# Altium PCB GateDrive.PcbDoc (part 1 of 4)
Units mm, origin at the board's own origin, x right, y up, seen from the top; angles counter-clockwise.
Board outline 204.3 x 129.8 mm, 4 copper layers (Top Layer, Internal Plane 1, Internal Plane 2, Bottom Layer), stack 0.778 mm thick; 412 components, 227 nets, 1153 pads, 570 vias.
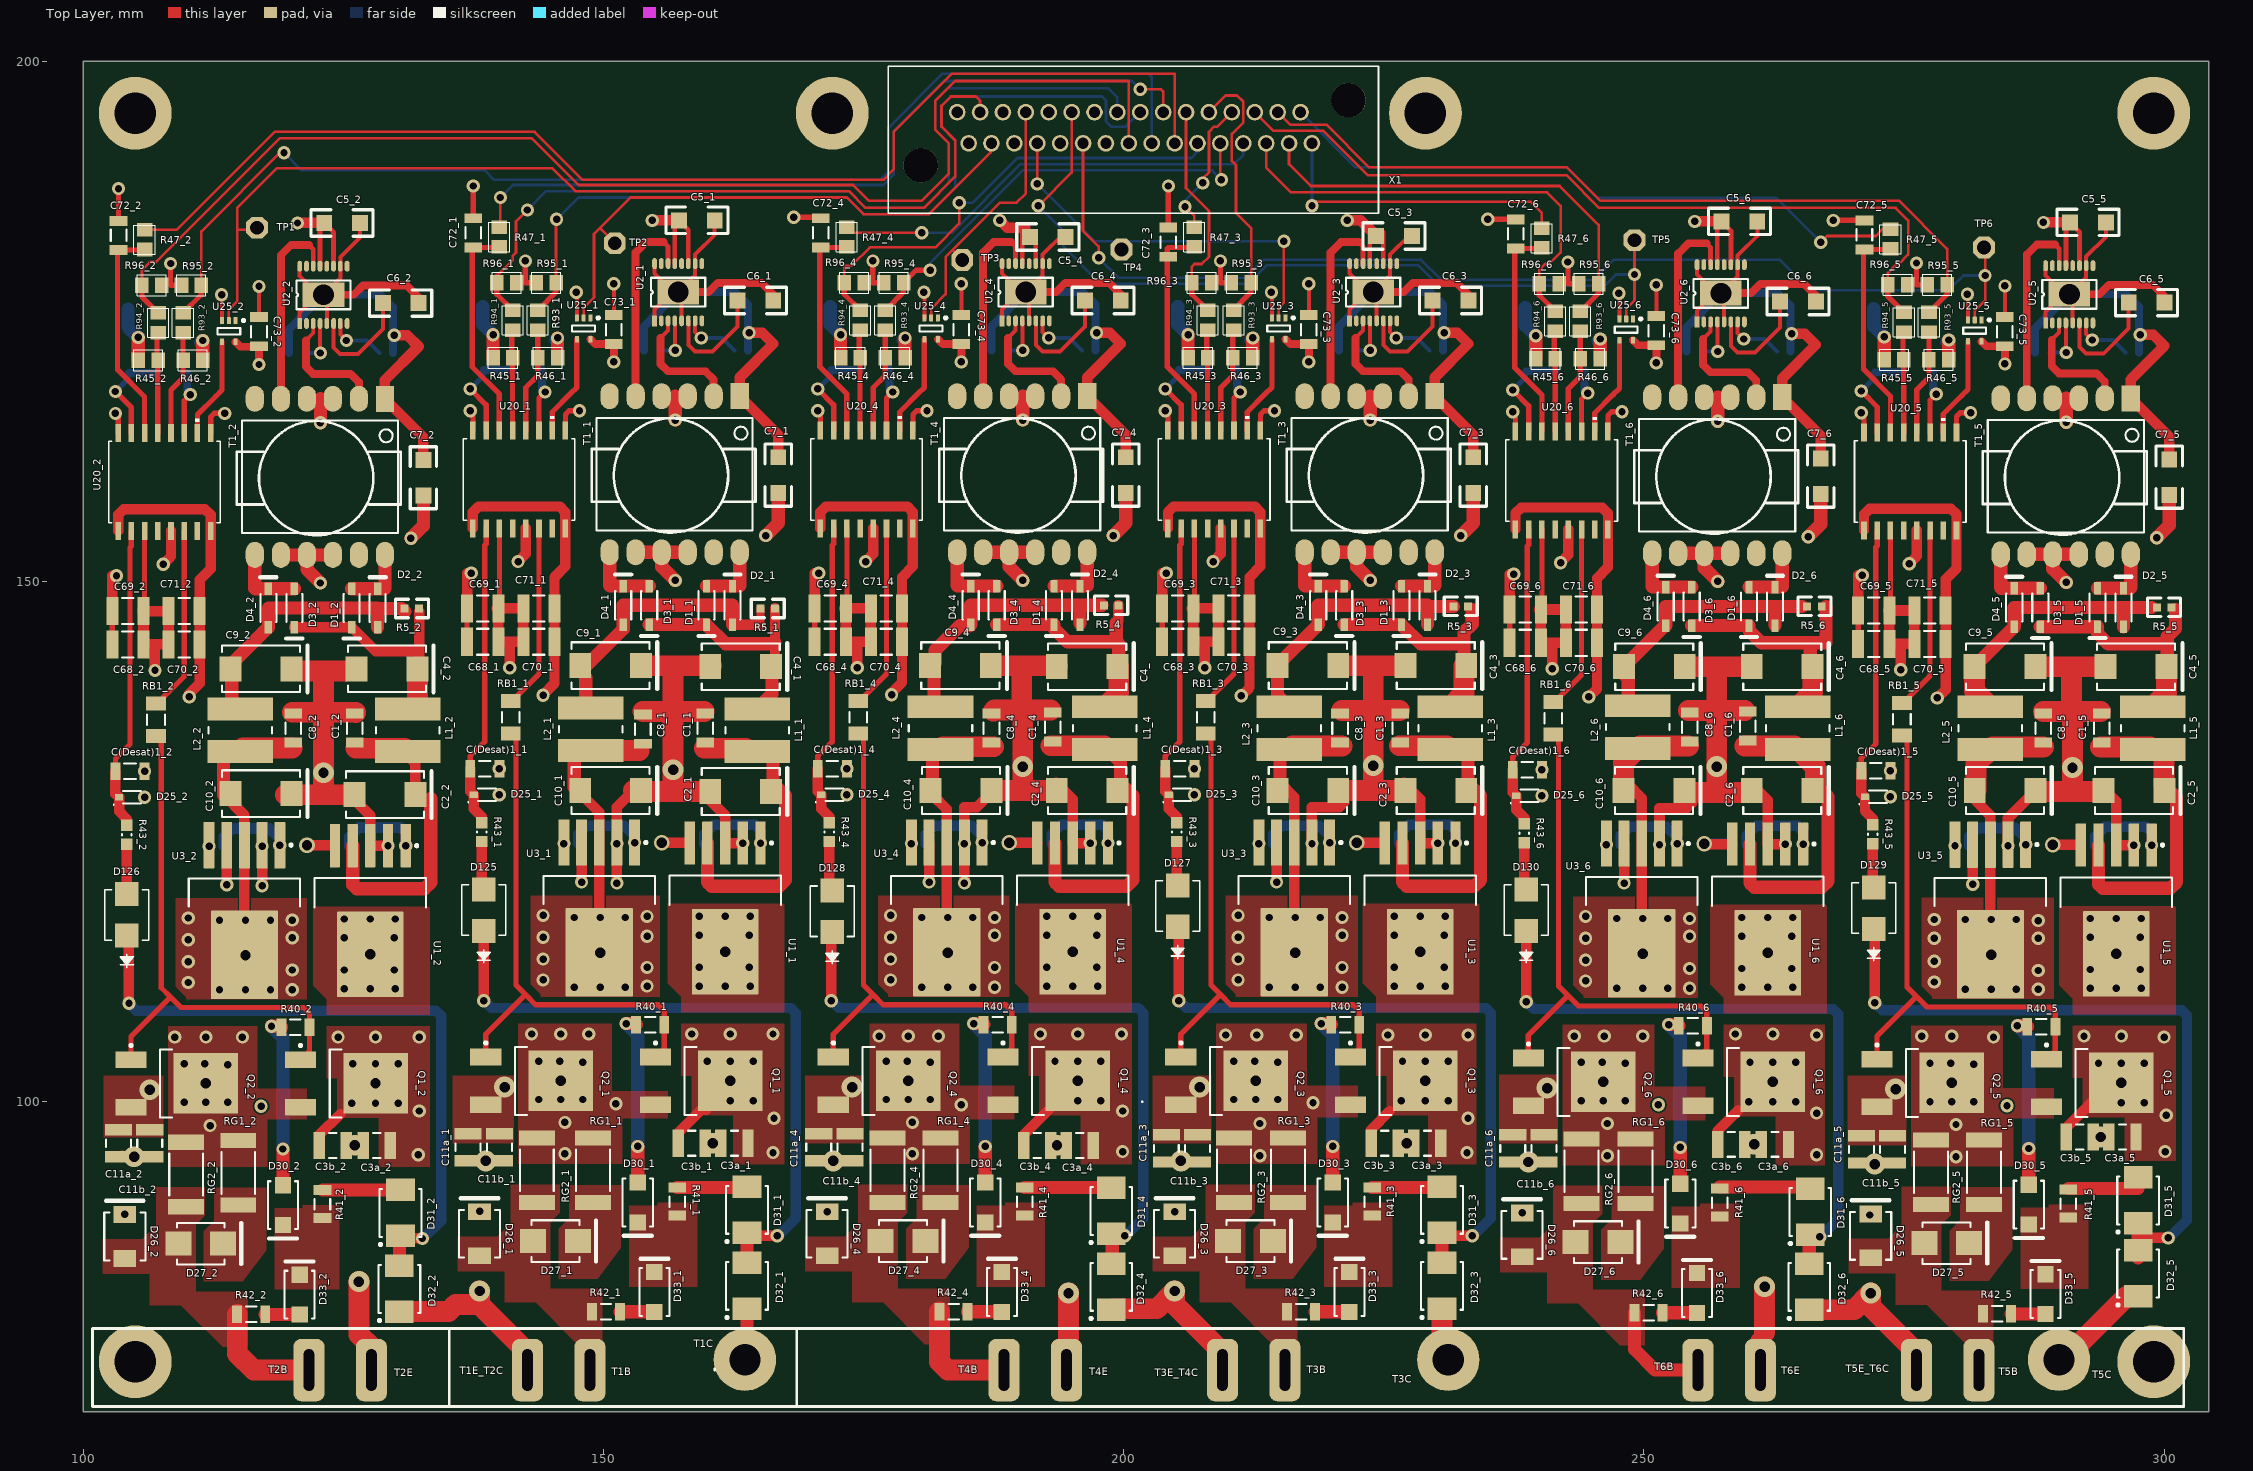
[diagram p0: Top Layer view]
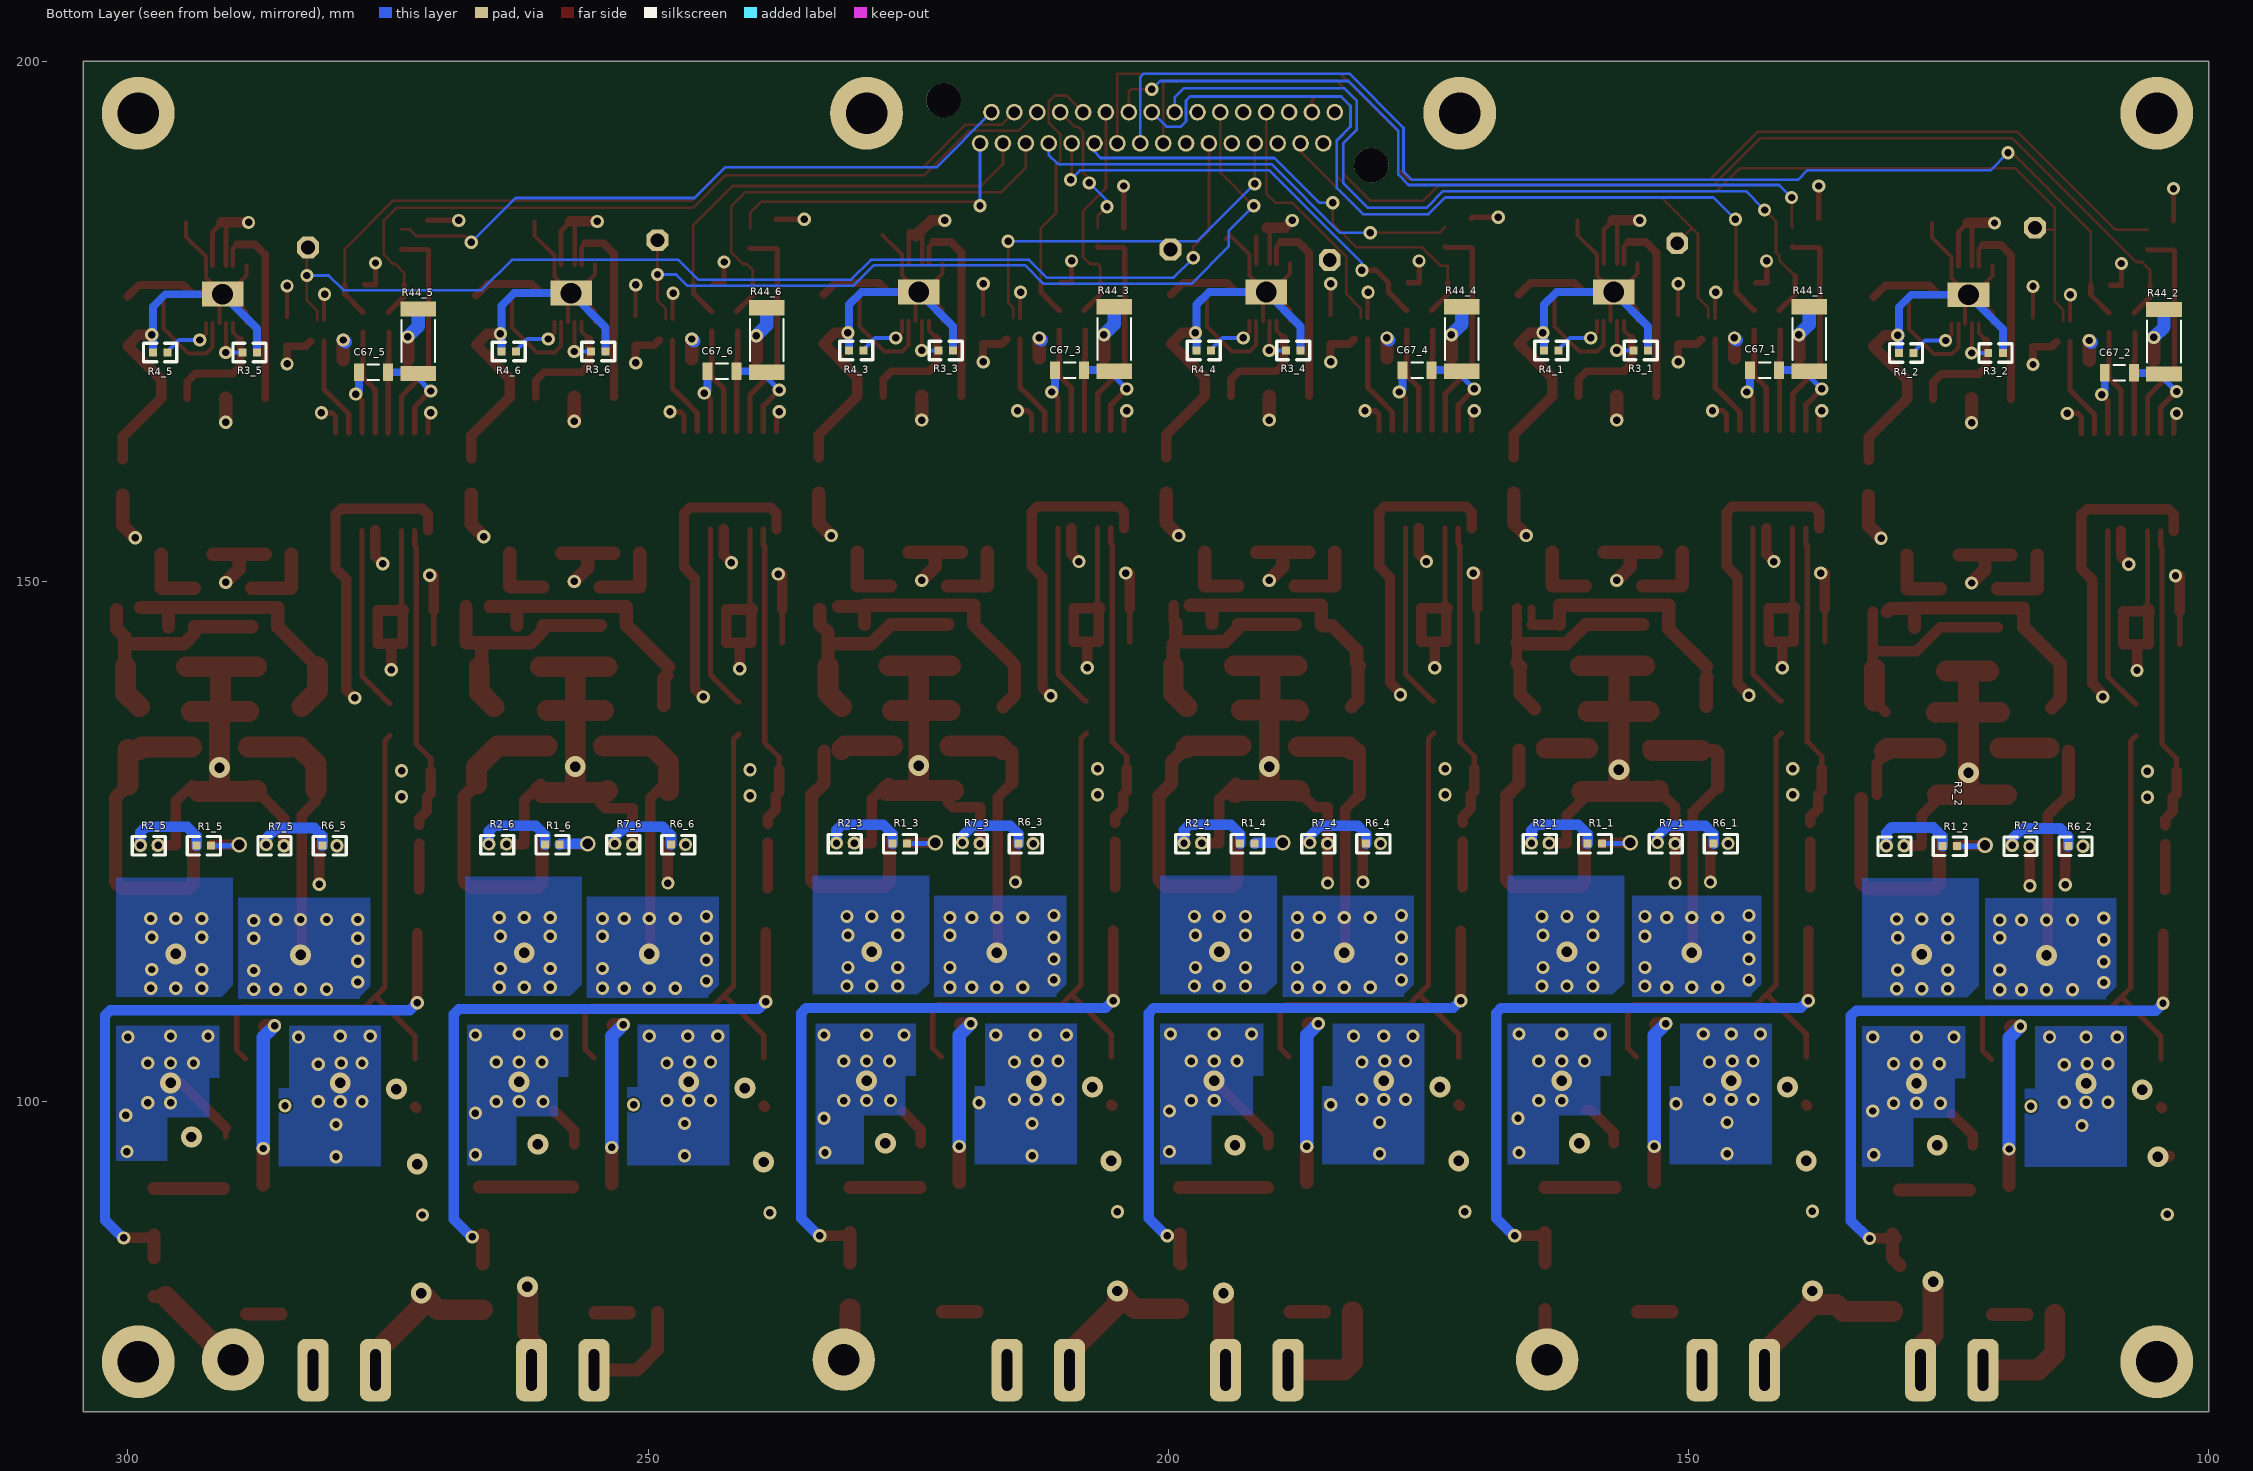
[diagram p1: Bottom Layer view, seen from below]
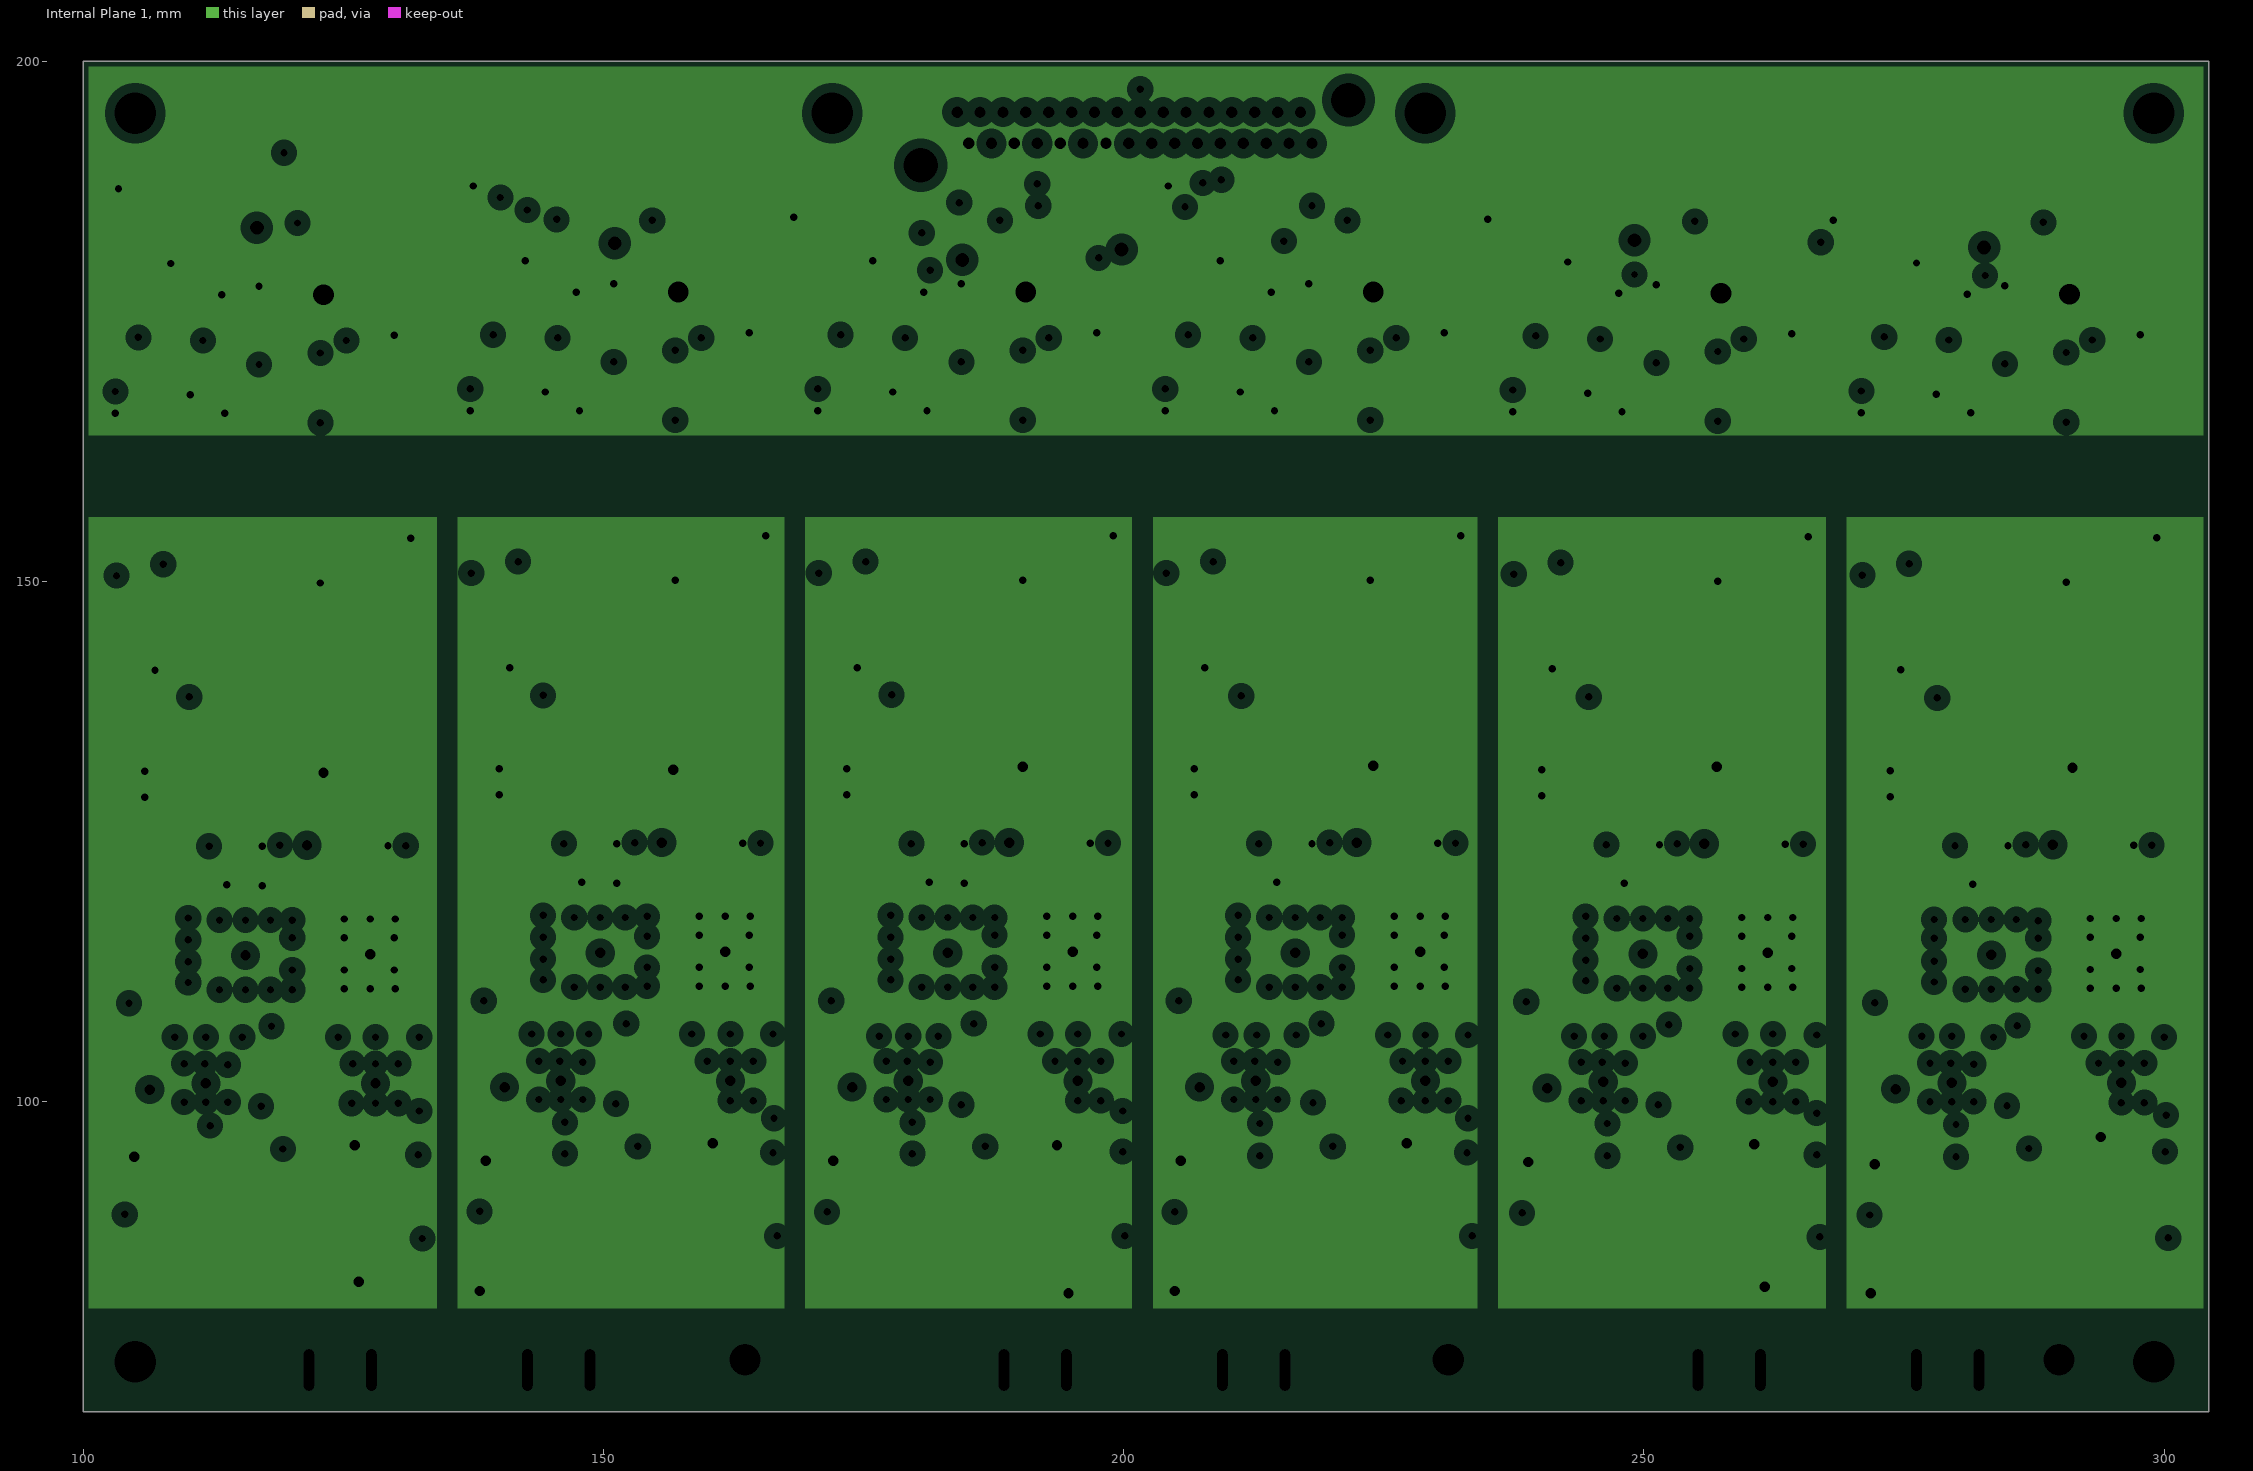
[diagram p2: Internal Plane 1, clearances drawn from the general rule]
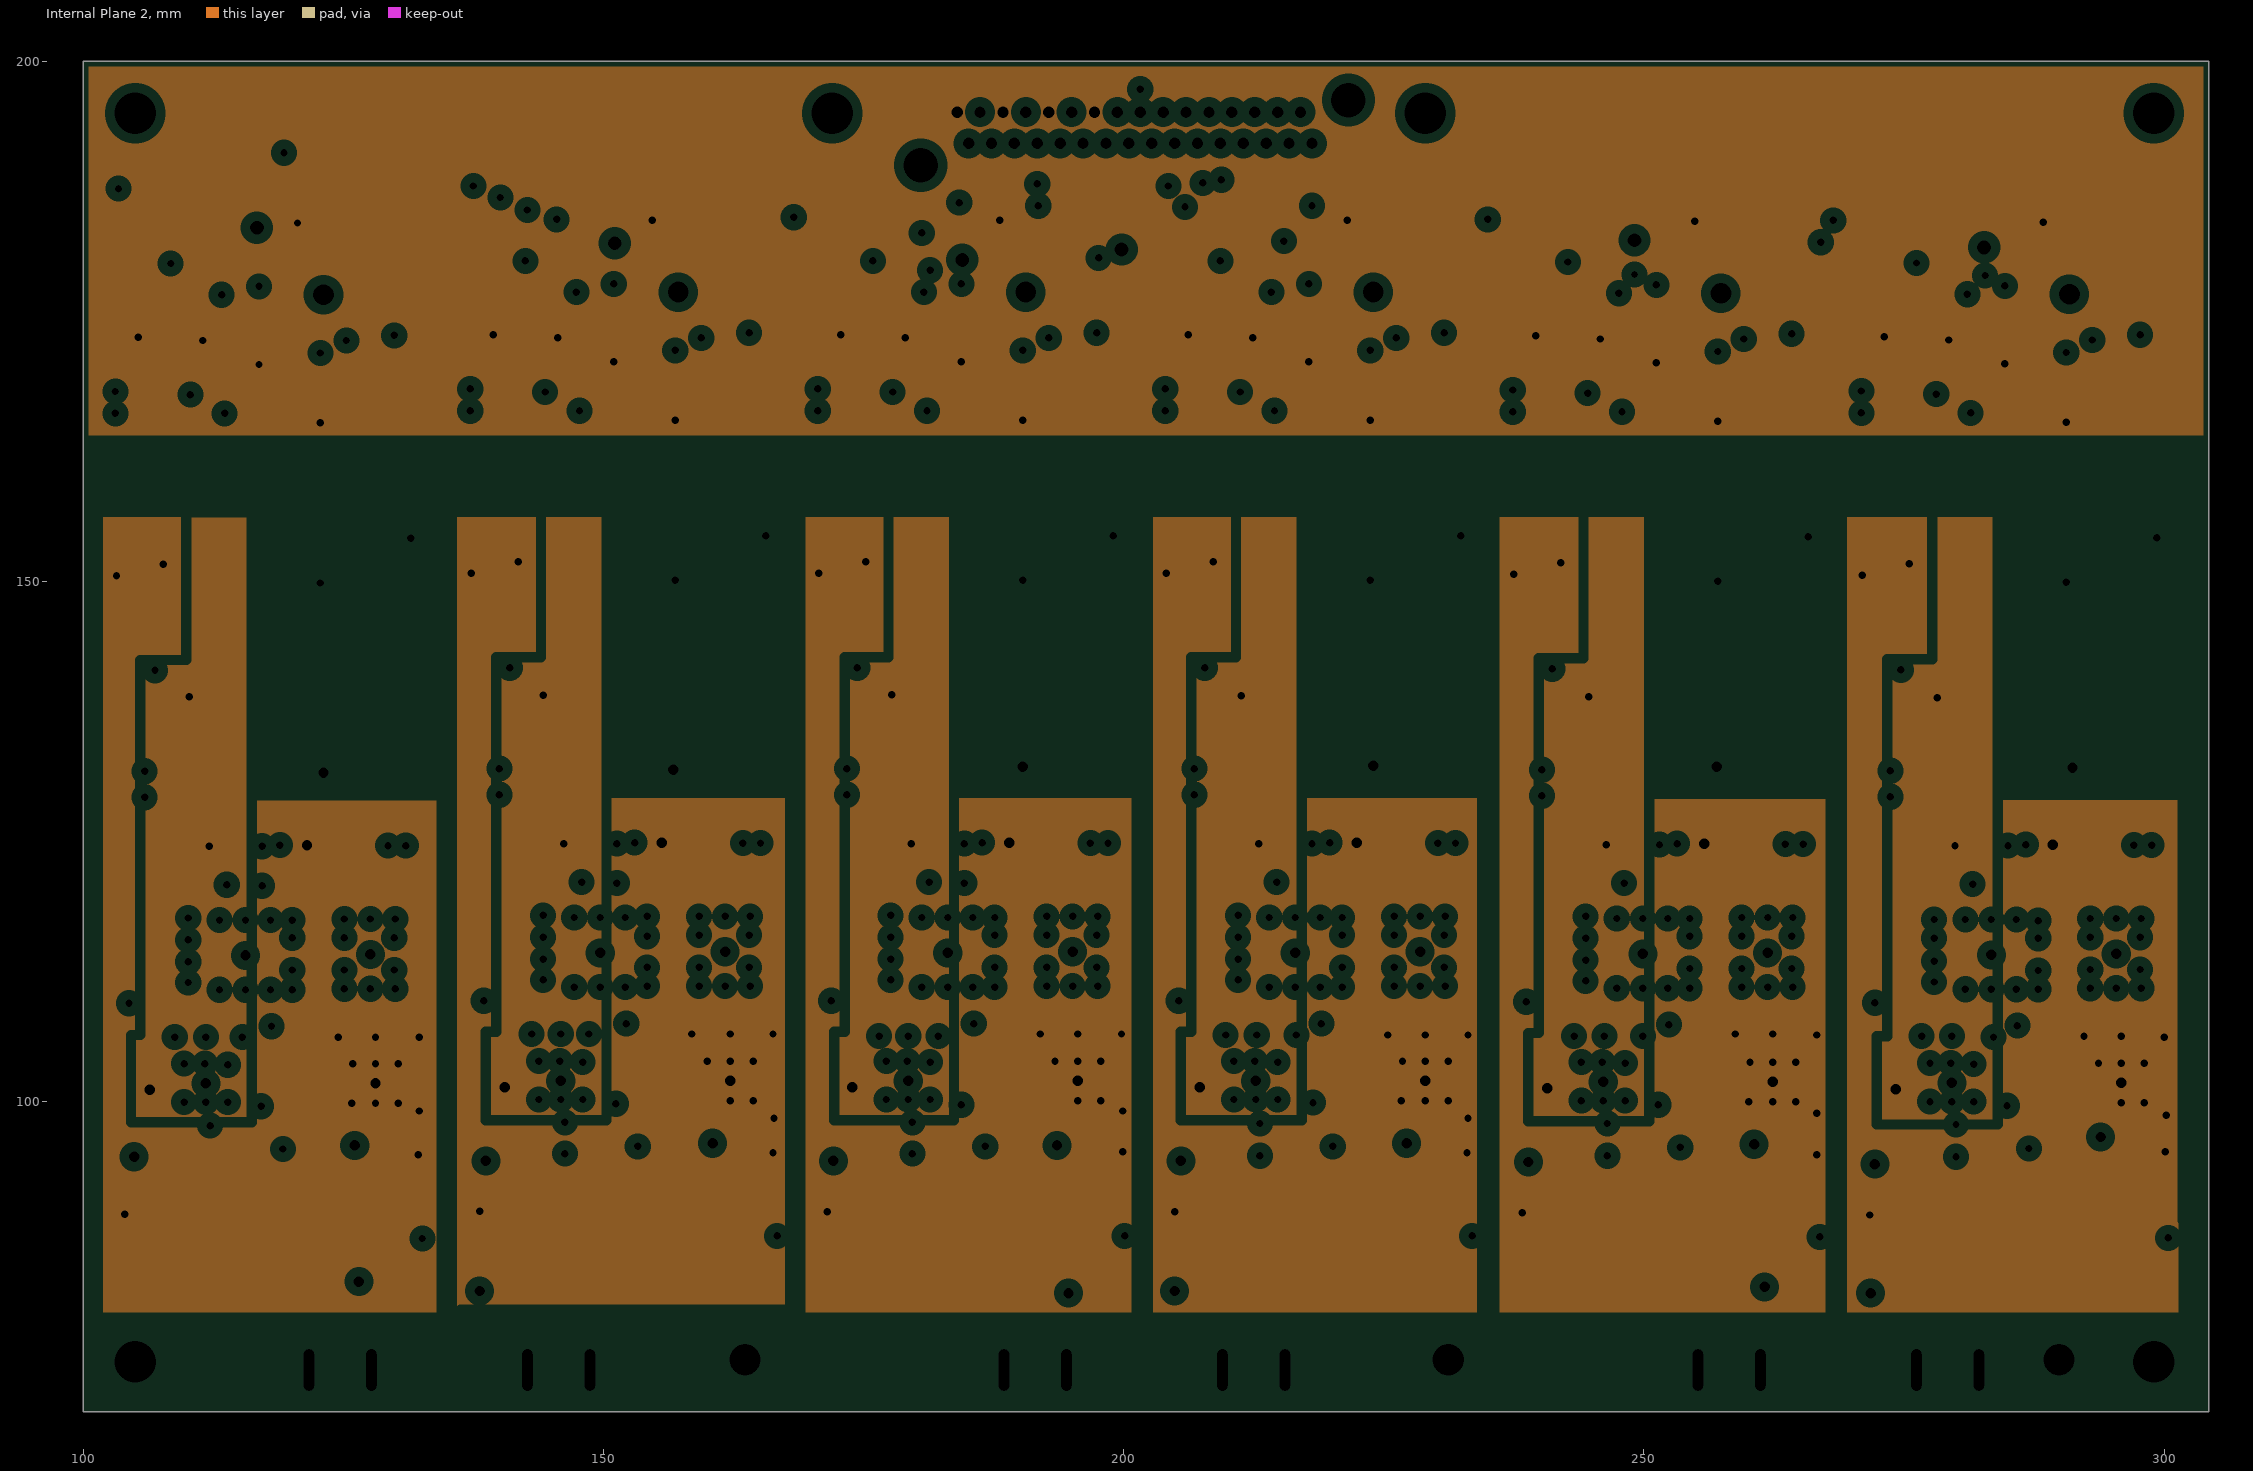
[diagram p3: Internal Plane 2, clearances drawn from the general rule]

## Layer stack, top to bottom
Top Solder: solder mask 0.0102, Solder Resist, Dk 3.5
Top Layer: signal copper 0.0356
Dielectric 1: core 0.254, FR-4, Dk 4.2
Internal Plane 1: plane copper 0.036, net (Multiple Nets)
Dielectric 3: prepreg 0.127, Dk 4.2
Internal Plane 2: plane copper 0.036, net (Multiple Nets)
Dielectric 2: core 0.254, Dk 4.2
Bottom Layer: signal copper 0.0356
Bottom Solder: solder mask 0.0102, Solder Resist, Dk 3.5

## Board outline
100,200 100,70.2 304.3,70.2 304.3,200

## Design rules (kind name [scope] priority, off if disabled: settings)
Clearance [All] p1: gap=0.152 ignorepadtopadclearanceinfootprint=FALSE
HoleSize [All] p1: absolutevalues=TRUE maxlimit=5 minlimit=0.381 maxpercent=80.000 minpercent=20.000
MinimumSolderMaskSliver [All] p1 off: minsoldermaskwidth=0.254
NetAntennae [All] p1 off: netantennaetolerance=0
PlaneClearance [All] p1: clearance=0.9
PlaneConnect [All] p1: planeconnectstyle=Relief reliefexpansion=0.508 reliefentries=4 reliefconductorwidth=0.6 reliefairgap=0.35
PolygonConnect [All] p1: connectstyle=Direct reliefconductorwidth=0.254 reliefentries=4 polygonreliefangle="90 Angle" airgapwidth=0.254
RoutingVias [All] p1: holewidth=0.711 width=1.27 viastyle="Through Hole" minholewidth=0.711 minwidth=1.27 maxholewidth=0.711 maxwidth=1.27
SilkToSolderMaskClearance [IsPad] p1 off: minsilkscreentomaskgap=0.254 clearancetoexposedcopper=TRUE
SolderMaskExpansion [All] p1: expansion=0.102
Width [All] p1: maxlimit=2.54 minlimit=0.254 preferedwidth=1.27
24 further rules are at their usual default settings.

## Classes and differential pairs
component class IO: C73_1 C73_2 C73_3 C73_4 C73_5 C73_6 TP1 TP2 TP3 TP4 TP5 TP6 U25_1 U25_2 U25_3 U25_4 U25_5 U25_6 X1 X?
component class "Gate Drivers W Phase": C67_5 C67_6 C68_5 C68_6 C69_5 C69_6 C70_5 C70_6 C71_5 C71_6 C72_5 C72_6 C(Desat)1_5 C(Desat)1_6 CR1_5 CR1_6 D25_5 D25_6 D26_5 D26_6 D27_5 D27_6 D30_5 D30_6 D31_5 D31_6 D32_5 D32_6 D33_5 D33_6 D129 D130 Q1_5 Q1_6 Q2_5 Q2_6 R40_5 R40_6 R41_5 R41_6 R42_5 R42_6 R43_5 R43_6 R44_5 R44_6 R45_5 R45_6 R46_5 R46_6 R47_5 R47_6 R93_5 R93_6 R94_5 R94_6 R95_5 R95_6 R96_5 R96_6 RB1_5 RB1_6 RG1_5 RG1_6 RG2_5 RG2_6 T5B T5C T5E_T6C T6B T6E U20_5 U20_6
component class "Gate Drivers V Phase": C67_3 C67_4 C68_3 C68_4 C69_3 C69_4 C70_3 C70_4 C71_3 C71_4 C72_3 C72_4 C(Desat)1_3 C(Desat)1_4 CR1_3 CR1_4 D25_3 D25_4 D26_3 D26_4 D27_3 D27_4 D30_3 D30_4 D31_3 D31_4 D32_3 D32_4 D33_3 D33_4 D127 D128 Q1_3 Q1_4 Q2_3 Q2_4 R40_3 R40_4 R41_3 R41_4 R42_3 R42_4 R43_3 R43_4 R44_3 R44_4 R45_3 R45_4 R46_3 R46_4 R47_3 R47_4 R93_3 R93_4 R94_3 R94_4 R95_3 R95_4 R96_3 R96_4 RB1_3 RB1_4 RG1_3 RG1_4 RG2_3 RG2_4 T3B T3C T3E_T4C T4B T4E U20_3 U20_4
component class "Gate Drivers U Phase": C67_1 C67_2 C68_1 C68_2 C69_1 C69_2 C70_1 C70_2 C71_1 C71_2 C72_1 C72_2 C(Desat)1_1 C(Desat)1_2 CR1_1 CR1_2 D25_1 D25_2 D26_1 D26_2 D27_1 D27_2 D30_1 D30_2 D31_1 D31_2 D32_1 D32_2 D33_1 D33_2 D125 D126 Q1_1 Q1_2 Q2_1 Q2_2 R40_1 R40_2 R41_1 R41_2 R42_1 R42_2 R43_1 R43_2 R44_1 R44_2 R45_1 R45_2 R46_1 R46_2 R47_1 R47_2 R93_1 R93_2 R94_1 R94_2 R95_1 R95_2 R96_1 R96_2 RB1_1 RB1_2 RG1_1 RG1_2 RG2_1 RG2_2 T1B T1C T1E_T2C T2B T2E U20_1 U20_2
component class "Gatedrive Power2": C1_4 C1_5 C1_6 C2_4 C2_5 C2_6 C3a_4 C3a_5 C3a_6 C3b_4 C3b_5 C3b_6 C4_ C4_5 C4_6 C5_4 C5_5 C5_6 C6_4 C6_5 C6_6 C7_4 C7_5 C7_6 C8_4 C8_5 C8_6 C9_4 C9_5 C9_6 C10_4 C10_5 C10_6 C11a_4 C11a_5 C11a_6 C11b_4 C11b_5 C11b_6 C34 C35 C36 C37 C38 C39 C40 C41 C42 C43 C44 C45 C46 C47 C48 C49 C50 C51 C52 C53 C54 C55 C56 C57 C58 C59 C60 C61 C62 C63 C64 C65 C66 D1_4 D1_5 D1_6 D2_4 D2_5 D2_6 D3_4 D3_5 D3_6 D4_4 D4_5 D4_6 D13 D14 D15 D16 D17 D18 D19 D20 D21 D22 D23 D24 L1_4 L1_5 L1_6 L2_4 L2_5 L2_6 L7 L8 L9 L10 L11 L12 R1_4 R1_5 R1_6 R2_4 R2_5 R2_6 R3_4 R3_5 R3_6 R4_4 R4_5 R4_6 R5_4 R5_5 R5_6 R6_4 R6_5 R6_6 R7_4 R7_5 R7_6 R22 R23 R24 R25 R26 R27 R28 R29 R30 R31 R32 R33 R34 R35 R36 R37 R38 R39 T1_4 T1_5 T1_6 T4 T5 T6 U1_4 U1_5 U1_6 U2_4 U2_5 U2_6 U3_4 U3_5 U3_6 U10 U11 U12 U13 U14 U15 U16 U17 U18
component class "Gatedrive Power1": C1_1 C1_2 C1_3 C2_1 C2_2 C2_3 C3a_1 C3a_2 C3a_3 C3b_1 C3b_2 C3b_3 C4_1 C4_2 C4_3 C5_1 C5_2 C5_3 C6_1 C6_2 C6_3 C7_1 C7_2 C7_3 C8_1 C8_2 C8_3 C9_1 C9_2 C9_3 C10_1 C10_2 C10_3 C11a_1 C11a_2 C11a_3 C11b_1 C11b_2 C11b_3 C12 C13 C14 C15 C16 C17 C18 C19 C20 C21 C22 C23 C24 C25 C26 C27 C28 C29 C30 C31 C32 C33 D1_1 D1_2 D1_3 D2_1 D2_2 D2_3 D3_1 D3_2 D3_3 D4_1 D4_2 D4_3 D5 D6 D7 D8 D9 D10 D11 D12 L1_1 L1_2 L1_3 L2_1 L2_2 L2_3 L3 L4 L5 L6 R1_1 R1_2 R1_3 R2_1 R2_2 R2_3 R3_1 R3_2 R3_3 R4_1 R4_2 R4_3 R5_1 R5_2 R5_3 R6_1 R6_2 R6_3 R7_1 R7_2 R7_3 R8 R9 R10 R11 R12 R13 R14 R15 R16 R17 R18 R19 R20 R21 T1_1 T1_2 T1_3 T2 T3 U1_1 U1_2 U1_3 U2_1 U2_2 U2_3 U3_1 U3_2 U3_3 U4 U5 U6 U7 U8 U9

## Components (designator, comment, footprint, x,y, rotation, side; value= is the part's Value field where it differs from the comment)
C1_1 "CAP 470nF 25V 1206(3216)" CAPC1206(3216)100_L 159.8,135.9 r270 top value=470nF
C1_2 "CAP 470nF 25V 1206(3216)" CAPC1206(3216)100_L 126.1,135.9 r270 top value=470nF
C1_3 "CAP 470nF 25V 1206(3216)" CAPC1206(3216)100_L 226.6,135.9 r270 top value=470nF
C1_4 "CAP 470nF 25V 1206(3216)" CAPC1206(3216)100_L 193.2,136 r270 top value=470nF
C1_5 "CAP 470nF 25V 1206(3216)" CAPC1206(3216)100_L 294,135.9 r270 top value=470nF
C1_6 "CAP 470nF 25V 1206(3216)" CAPC1206(3216)100_L 260,136.1 r270 top value=470nF
C2_1 "TPSD476K025R0150" AVX-7343-31_L 163.2,129.8 r180 top
C2_2 "TPSD476K025R0150" AVX-7343-31_L 129,129.5 r180 top
C2_3 "TPSD476K025R0150" AVX-7343-31_L 230,129.9 r180 top
C2_4 "TPSD476K025R0150" AVX-7343-31_L 196.5,129.9 r180 top
C2_5 "TPSD476K025R0150" AVX-7343-31_L 297.1,129.9 r180 top
C2_6 "TPSD476K025R0150" AVX-7343-31_L 263.3,129.9 r180 top
C3a_1 "12103D226KAT2A" CAPC3225X279X50LL20T25 162.6,96 r0 top
C3a_2 "12103D226KAT2A" CAPC3225X279X50LL20T25 128.2,95.8 r0 top
C3a_3 "12103D226KAT2A" CAPC3225X279X50LL20T25 229.2,96 r0 top
C3a_4 "12103D226KAT2A" CAPC3225X279X50LL20T25 195.8,95.8 r0 top
C3a_5 "12103D226KAT2A" CAPC3225X279X50LL20T25 296,96.6 r0 top
C3a_6 "12103D226KAT2A" CAPC3225X279X50LL20T25 262.6,95.9 r0 top
C3b_1 "12103D226KAT2A" CAPC3225X279X50LL20T25 158.5,96 r180 top
C3b_2 "12103D226KAT2A" CAPC3225X279X50LL20T25 124,95.8 r180 top
C3b_3 "12103D226KAT2A" CAPC3225X279X50LL20T25 225.1,96 r180 top
C3b_4 "12103D226KAT2A" CAPC3225X279X50LL20T25 191.7,95.8 r180 top
C3b_5 "12103D226KAT2A" CAPC3225X279X50LL20T25 291.9,96.6 r180 top
C3b_6 "12103D226KAT2A" CAPC3225X279X50LL20T25 258.4,95.9 r180 top
C4_ "TPSD476K025R0150" AVX-7343-31_L 196.5,141.8 r180 top
C4_1 "TPSD476K025R0150" AVX-7343-31_L 163.2,141.8 r180 top
C4_2 "TPSD476K025R0150" AVX-7343-31_L 129.2,141.6 r180 top
C4_3 "TPSD476K025R0150" AVX-7343-31_L 230,141.9 r180 top
C4_5 "TPSD476K025R0150" AVX-7343-31_L 297.3,141.8 r180 top
C4_6 "TPSD476K025R0150" AVX-7343-31_L 263.3,141.8 r180 top
C5_1 "22uF 15V" 1206 157.271,184.7 r0 top
C5_2 "22uF 15V" 1206 123.171,184.45 r0 top
C5_3 "22uF 15V" 1206 224.271,183.2 r0 top
C5_4 "22uF 15V" 1206 191,183.1 r0 top
C5_5 "22uF 15V" 1206 290.971,184.5 r0 top
C5_6 "22uF 15V" 1206 257.471,184.6 r0 top
C6_1 "820pF" 1206 162.9,177 r0 top
C6_2 "820pF" 1206 128.8,176.75 r0 top
C6_3 "820pF" 1206 229.7,177 r0 top
C6_4 "820pF" 1206 196.3,177 r0 top
C6_5 "820pF" 1206 296.6,176.8 r0 top
C6_6 "820pF" 1206 263.1,176.9 r0 top
C7_1 "2.2nF 1KV" 1206 166.8,161.929 r270 top
C7_2 "2.2nF 1KV" 1206 132.7,161.679 r270 top
C7_3 "2.2nF 1KV" 1206 233.6,161.929 r270 top
C7_4 "2.2nF 1KV" 1206 200.2,161.929 r270 top
C7_5 "2.2nF 1KV" 1206 300.5,161.729 r270 top
C7_6 "2.2nF 1KV" 1206 267,161.829 r270 top
C8_1 "CAP 470nF 25V 1206(3216)" CAPC1206(3216)100_L 153.8,135.8 r270 top value=470nF
C8_2 "CAP 470nF 25V 1206(3216)" CAPC1206(3216)100_L 120.2,135.9 r270 top value=470nF
C8_3 "CAP 470nF 25V 1206(3216)" CAPC1206(3216)100_L 220.8,135.9 r270 top value=470nF
C8_4 "CAP 470nF 25V 1206(3216)" CAPC1206(3216)100_L 187.3,135.9 r270 top value=470nF
C8_5 "CAP 470nF 25V 1206(3216)" CAPC1206(3216)100_L 288.4,135.9 r270 top value=470nF
C8_6 "CAP 470nF 25V 1206(3216)" CAPC1206(3216)100_L 254.4,136 r270 top value=470nF
C9_1 "TPSD476K025R0150" AVX-7343-31_L 150.7,141.9 r180 top
C9_2 "TPSD476K025R0150" AVX-7343-31_L 117.1,141.6 r180 top
C9_3 "TPSD476K025R0150" AVX-7343-31_L 217.7,141.9 r180 top
C9_4 "TPSD476K025R0150" AVX-7343-31_L 184.3,141.9 r180 top
C9_5 "TPSD476K025R0150" AVX-7343-31_L 284.7,141.8 r180 top
C9_6 "TPSD476K025R0150" AVX-7343-31_L 251,141.8 r180 top
C10_1 "TPSD476K025R0150" AVX-7343-31_L 150.7,129.9 r180 top
C10_2 "TPSD476K025R0150" AVX-7343-31_L 117.1,129.6 r180 top
C10_3 "TPSD476K025R0150" AVX-7343-31_L 217.7,129.9 r180 top
C10_4 "TPSD476K025R0150" AVX-7343-31_L 184.375,129.9 r180 top
C10_5 "TPSD476K025R0150" AVX-7343-31_L 284.725,129.9 r180 top
C10_6 "TPSD476K025R0150" AVX-7343-31_L 250.975,129.9 r180 top
C11a_1 "12103D226KAT2A" CAPC3225X279X50LL20T25 137,95.6 r270 top
C11a_2 "12103D226KAT2A" CAPC3225X279X50LL20T25 103.4,96 r270 top
C11a_3 "12103D226KAT2A" CAPC3225X279X50LL20T25 204.1,95.5 r270 top
C11a_4 "12103D226KAT2A" CAPC3225X279X50LL20T25 170.7,95.6 r270 top
C11a_5 "12103D226KAT2A" CAPC3225X279X50LL20T25 270.9,95.4 r270 top
C11a_6 "12103D226KAT2A" CAPC3225X279X50LL20T25 237.4,95.5 r270 top
C11b_1 "12103D226KAT2A" CAPC3225X279X50LL20T25 140,95.6 r270 top
C11b_2 "12103D226KAT2A" CAPC3225X279X50LL20T25 106.4,96 r270 top
C11b_3 "12103D226KAT2A" CAPC3225X279X50LL20T25 207.1,95.5 r270 top
C11b_4 "12103D226KAT2A" CAPC3225X279X50LL20T25 173.7,95.6 r270 top
C11b_5 "12103D226KAT2A" CAPC3225X279X50LL20T25 273.9,95.4 r270 top
C11b_6 "12103D226KAT2A" CAPC3225X279X50LL20T25 240.4,95.5 r270 top
C67_1 "100nF" CAPC1206(3216)75_L 142.7,170.3 r180 bottom
C67_2 "100nF" CAPC1206(3216)75_L 108.6,170.05 r180 bottom
C67_3 "100nF" CAPC1206(3216)75_L 209.5,170.3 r180 bottom
C67_4 "100nF" CAPC1206(3216)75_L 176.1,170.3 r180 bottom
C67_5 "100nF" CAPC1206(3216)75_L 276.4,170.1 r180 bottom
C67_6 "100nF" CAPC1206(3216)75_L 242.9,170.2 r180 bottom
C68_1 "1uF" CAPC1210(3225)170_N 138.4,144.2 r180 top
C68_2 "1uF" CAPC1210(3225)170_N 104.3,143.95 r180 top
C68_3 "1uF" CAPC1210(3225)170_N 205.2,144.2 r180 top
C68_4 "1uF" CAPC1210(3225)170_N 171.8,144.2 r180 top
C68_5 "1uF" CAPC1210(3225)170_N 272.1,144 r180 top
C68_6 "1uF" CAPC1210(3225)170_N 238.6,144.1 r180 top
C69_1 "1uF" CAPC1210(3225)170_N 138.4,147.4 r180 top
C69_2 "1uF" CAPC1210(3225)170_N 104.3,147.15 r180 top
C69_3 "1uF" CAPC1210(3225)170_N 205.2,147.4 r180 top
C69_4 "1uF" CAPC1210(3225)170_N 171.8,147.4 r180 top
C69_5 "1uF" CAPC1210(3225)170_N 272.1,147.2 r180 top
C69_6 "1uF" CAPC1210(3225)170_N 238.6,147.3 r180 top
C70_1 "1uF" CAPC1210(3225)170_N 143.8,144.2 r180 top
C70_2 "1uF" CAPC1210(3225)170_N 109.7,143.95 r180 top
C70_3 "1uF" CAPC1210(3225)170_N 210.6,144.2 r180 top
C70_4 "1uF" CAPC1210(3225)170_N 177.2,144.2 r180 top
C70_5 "1uF" CAPC1210(3225)170_N 277.5,144 r180 top
C70_6 "1uF" CAPC1210(3225)170_N 244,144.1 r180 top
C71_1 "1uF" CAPC1210(3225)170_N 143.8,147.4 r180 top
C71_2 "1uF" CAPC1210(3225)170_N 109.7,147.15 r180 top
C71_3 "1uF" CAPC1210(3225)170_N 210.6,147.4 r180 top
C71_4 "1uF" CAPC1210(3225)170_N 177.2,147.4 r180 top
C71_5 "1uF" CAPC1210(3225)170_N 277.5,147.2 r180 top
C71_6 "1uF" CAPC1210(3225)170_N 244,147.3 r180 top
C72_1 "100pF" CAPC1206(3216)75_L 137.5,183.5 r270 top
C72_2 "100pF" CAPC1206(3216)75_L 103.4,183.25 r270 top
C72_3 "100pF" CAPC1206(3216)75_L 204.3,182.6 r270 top
C72_4 "100pF" CAPC1206(3216)75_L 170.9,183.5 r270 top
C72_5 "100pF" CAPC1206(3216)75_L 271.2,183.3 r270 top
C72_6 "100pF" CAPC1206(3216)75_L 237.7,183.4 r270 top
C73_1 "100nF" CAPC1206(3216)75_L 151,174.2 r90 top
C73_2 "100nF" CAPC1206(3216)75_L 116.9,174 r90 top
C73_3 "100nF" CAPC1206(3216)75_L 217.8,174.2 r90 top
C73_4 "100nF" CAPC1206(3216)75_L 184.4,174.2 r90 top
C73_5 "100nF" CAPC1206(3216)75_L 284.7,174 r90 top
C73_6 "100nF" CAPC1206(3216)75_L 251.2,174.1 r90 top
C(Desat)1_1 "100pF" CAPC1206(3216)75_L 138.6,132 r180 top
C(Desat)1_2 "100pF" CAPC1206(3216)75_L 104.5,131.75 r180 top
C(Desat)1_3 "100pF" CAPC1206(3216)75_L 205.4,132 r180 top
C(Desat)1_4 "100pF" CAPC1206(3216)75_L 172,132 r180 top
C(Desat)1_5 "100pF" CAPC1206(3216)75_L 272.3,131.8 r180 top
C(Desat)1_6 "100pF" CAPC1206(3216)75_L 238.8,131.9 r180 top
D1_1 "B0540W-7-F" DIOD-SOD-123-2-A_V 159.9,147.7 r270 top
D1_2 "B0540W-7-F" DIOD-SOD-123-2-A_V 125.8,147.45 r270 top
D1_3 "B0540W-7-F" DIOD-SOD-123-2-A_V 226.7,147.7 r270 top
D1_4 "B0540W-7-F" DIOD-SOD-123-2-A_V 193.3,147.7 r270 top
D1_5 "B0540W-7-F" DIOD-SOD-123-2-A_V 293.6,147.5 r270 top
D1_6 "B0540W-7-F" DIOD-SOD-123-2-A_V 260.1,147.6 r270 top
D2_1 "B0540W-7-F" DIOD-SOD-123-2-A_V 162.4,147.7 r90 top
D2_2 "B0540W-7-F" DIOD-SOD-123-2-A_V 128.3,147.45 r90 top
D2_3 "B0540W-7-F" DIOD-SOD-123-2-A_V 229.2,147.7 r90 top
D2_4 "B0540W-7-F" DIOD-SOD-123-2-A_V 195.8,147.7 r90 top
D2_5 "B0540W-7-F" DIOD-SOD-123-2-A_V 296.1,147.5 r90 top
D2_6 "B0540W-7-F" DIOD-SOD-123-2-A_V 262.6,147.6 r90 top
D3_1 "B0540W-7-F" DIOD-SOD-123-2-A_V 154.4,147.7 r270 top
D3_2 "B0540W-7-F" DIOD-SOD-123-2-A_V 120.3,147.45 r270 top
D3_3 "B0540W-7-F" DIOD-SOD-123-2-A_V 221.2,147.7 r270 top
D3_4 "B0540W-7-F" DIOD-SOD-123-2-A_V 187.8,147.7 r270 top
D3_5 "B0540W-7-F" DIOD-SOD-123-2-A_V 288.1,147.5 r270 top
D3_6 "B0540W-7-F" DIOD-SOD-123-2-A_V 254.6,147.6 r270 top
D4_1 "B0540W-7-F" DIOD-SOD-123-2-A_V 151.9,147.7 r90 top
D4_2 "B0540W-7-F" DIOD-SOD-123-2-A_V 117.8,147.45 r90 top
D4_3 "B0540W-7-F" DIOD-SOD-123-2-A_V 218.7,147.7 r90 top
D4_4 "B0540W-7-F" DIOD-SOD-123-2-A_V 185.3,147.7 r90 top
D4_5 "B0540W-7-F" DIOD-SOD-123-2-A_V 285.6,147.5 r90 top
D4_6 "B0540W-7-F" DIOD-SOD-123-2-A_V 252.1,147.6 r90 top
D25_1 "BAT165" INF-SOD323_V 138.8,129.5 r90 top
D25_2 "BAT165" INF-SOD323_V 104.7,129.25 r90 top
D25_3 "BAT165" INF-SOD323_V 205.6,129.5 r90 top
D25_4 "BAT165" INF-SOD323_V 172.2,129.5 r90 top
D25_5 "BAT165" INF-SOD323_V 272.5,129.3 r90 top
D25_6 "BAT165" INF-SOD323_V 239,129.4 r90 top
D26_1 "STPS160U" STM-SMB_P_V 138.1,87.3 r90 top
D26_2 "STPS160U" STM-SMB_P_V 104,87.05 r90 top
D26_3 "STPS160U" STM-SMB_P_V 204.9,87.3 r90 top
D26_4 "STPS160U" STM-SMB_P_V 171.5,87.3 r90 top
D26_5 "STPS160U" STM-SMB_P_V 271.8,87.1 r90 top
D26_6 "STPS160U" STM-SMB_P_V 238.3,87.2 r90 top
D27_1 "RS1MB-13-F" DIOD-SMB-2_V 145.4,86.6 r0 top
D27_2 "RS1MB-13-F" DIOD-SMB-2_V 111.3,86.35 r0 top
D27_3 "RS1MB-13-F" DIOD-SMB-2_V 212.2,86.6 r0 top
D27_4 "RS1MB-13-F" DIOD-SMB-2_V 178.8,86.6 r0 top
D27_5 "RS1MB-13-F" DIOD-SMB-2_V 279.1,86.4 r0 top
D27_6 "RS1MB-13-F" DIOD-SMB-2_V 245.6,86.5 r0 top
D30_1 "ES1D" FAIR-SMA-2_V 153.3,90.3 r270 top
D30_2 "ES1D" FAIR-SMA-2_V 119.2,90.05 r270 top
D30_3 "ES1D" FAIR-SMA-2_V 220.1,90.3 r270 top
D30_4 "ES1D" FAIR-SMA-2_V 186.7,90.3 r270 top
D30_5 "ES1D" FAIR-SMA-2_V 287,90.1 r270 top
D30_6 "ES1D" FAIR-SMA-2_V 253.5,90.2 r270 top
D31_1 "P6SMB36AT3G" ONSC-SMB-2-403A-03_J_V 163.8,89.6 r90 top
D31_2 "P6SMB36AT3G" ONSC-SMB-2-403A-03_J_V 130.5,89.3 r90 top
D31_3 "P6SMB36AT3G" ONSC-SMB-2-403A-03_J_V 230.6,89.6 r90 top
D31_4 "P6SMB36AT3G" ONSC-SMB-2-403A-03_J_V 198.8,89.5 r90 top
D31_5 "P6SMB36AT3G" ONSC-SMB-2-403A-03_J_V 297.5,90.5 r90 top
D31_6 "P6SMB36AT3G" ONSC-SMB-2-403A-03_J_V 266,89.4 r90 top
D32_1 "P6SMB36AT3G" ONSC-SMB-2-403A-03_J_V 163.8,82.3 r90 top
D32_2 "P6SMB36AT3G" ONSC-SMB-2-403A-03_J_V 130.4,82 r90 top
D32_3 "P6SMB36AT3G" ONSC-SMB-2-403A-03_J_V 230.6,82.3 r90 top
D32_4 "P6SMB36AT3G" ONSC-SMB-2-403A-03_J_V 198.8,82.2 r90 top
D32_5 "P6SMB36AT3G" ONSC-SMB-2-403A-03_J_V 297.5,83.49 r90 top
D32_6 "P6SMB36AT3G" ONSC-SMB-2-403A-03_J_V 265.9,82.2 r90 top
D33_1 "ES1D" FAIR-SMA-2_V 154.9,81.7 r90 top
D33_2 "ES1D" FAIR-SMA-2_V 120.8,81.45 r90 top
D33_3 "ES1D" FAIR-SMA-2_V 221.7,81.7 r90 top
D33_4 "ES1D" FAIR-SMA-2_V 188.3,81.7 r90 top
D33_5 "ES1D" FAIR-SMA-2_V 288.6,81.5 r90 top
D33_6 "ES1D" FAIR-SMA-2_V 255.1,81.6 r90 top
D125 "Part Number: STTH112U" SMB 138.5,118.4 r90 top value=Value
D126 "Part Number: STTH112U" SMB 104.2,117.95 r90 top value=Value
D127 "Part Number: STTH112U" SMB 205.2,118.8 r90 top value=Value
D128 "Part Number: STTH112U" SMB 172,118.3 r90 top value=Value
D129 "Part Number: STTH112U" SMB 272.1,118.6 r90 top value=Value
D130 "Part Number: STTH112U" SMB 238.7,118.4 r90 top value=Value
L1_1 "744053100" WE-TPC-5828-LH 164.8,135.7 r270 top
L1_2 "744053100" WE-TPC-5828-LH 131.2,135.7 r270 top
L1_3 "744053100" WE-TPC-5828-LH 231.4,135.9 r270 top
L1_4 "744053100" WE-TPC-5828-LH 198.2,135.9 r270 top
L1_5 "744053100" WE-TPC-5828-LH 298.9,135.9 r270 top
L1_6 "744053100" WE-TPC-5828-LH 264.8,135.9 r270 top
L2_1 "744053100" WE-TPC-5828-LH 148.8,135.8 r270 top
L2_2 "744053100" WE-TPC-5828-LH 115.1,135.7 r270 top
L2_3 "744053100" WE-TPC-5828-LH 215.9,135.9 r270 top
L2_4 "744053100" WE-TPC-5828-LH 182.4,135.9 r270 top
L2_5 "744053100" WE-TPC-5828-LH 283.3,135.9 r270 top
L2_6 "744053100" WE-TPC-5828-LH 249.4,136 r270 top
Q1_1 "MJD44H11T4" ONSC-DPAK-3-369C-01_V 159.4,102 r0 top
Q1_2 "MJD44H11T4" ONSC-DPAK-3-369C-01_V 125.3,101.75 r0 top
Q1_3 "MJD44H11T4" ONSC-DPAK-3-369C-01_V 226.2,102 r0 top
Q1_4 "MJD44H11T4" ONSC-DPAK-3-369C-01_V 192.8,102 r0 top
Q1_5 "MJD44H11T4" ONSC-DPAK-3-369C-01_V 293.1,101.8 r0 top
Q1_6 "MJD44H11T4" ONSC-DPAK-3-369C-01_V 259.6,101.9 r0 top
Q2_1 "MJD45H11T4" ONSC-DPAK-3-369C-01_V 143.1,102 r0 top
Q2_2 "MJD45H11T4" ONSC-DPAK-3-369C-01_V 109,101.75 r0 top
Q2_3 "MJD45H11T4" ONSC-DPAK-3-369C-01_V 209.9,102 r0 top
Q2_4 "MJD45H11T4" ONSC-DPAK-3-369C-01_V 176.5,102 r0 top
Q2_5 "MJD45H11T4" ONSC-DPAK-3-369C-01_V 276.8,101.8 r0 top
Q2_6 "MJD45H11T4" ONSC-DPAK-3-369C-01_V 243.3,101.9 r0 top
R1_1 "11K" 0603 159.7,124.8 r180 bottom
R1_2 "11K" 0603 125.6,124.55 r180 bottom
R1_3 "11K" 0603 226.5,124.8 r180 bottom
R1_4 "11K" 0603 193.1,124.8 r180 bottom
R1_5 "11K" 0603 293.4,124.6 r180 bottom
R1_6 "11K" 0603 259.9,124.7 r180 bottom
R2_1 "1K" 0603 163.6,124.8 r0 bottom
R2_2 "1K" 0603 129.5,124.55 r0 bottom
R2_3 "1K" 0603 230.4,124.8 r0 bottom
R2_4 "1K" 0603 197,124.8 r0 bottom
R2_5 "1K" 0603 297.3,124.6 r0 bottom
R2_6 "1K" 0603 263.8,124.7 r0 bottom
R3_1 "16K9" 0603 155.3,172.2 r180 bottom
R3_2 "16K9" 0603 121.2,171.95 r180 bottom
R3_3 "16K9" 0603 222.1,172.2 r180 bottom
R3_4 "16K9" 0603 188.7,172.2 r180 bottom
R3_5 "16K9" 0603 289,172 r180 bottom
R3_6 "16K9" 0603 255.5,172.1 r180 bottom
R4_1 "16K9" 0603 162.5,172.2 r0 bottom
R4_2 "16K9" 0603 128.4,171.95 r0 bottom
R4_3 "16K9" 0603 229.3,172.2 r0 bottom
R4_4 "16K9" 0603 195.9,172.2 r0 bottom
R4_5 "16K9" 0603 296.2,172 r0 bottom
R4_6 "16K9" 0603 262.7,172.1 r0 bottom
R5_1 "10K" 0603 166.497,147.4 r180 top
R5_2 "10K" 0603 132.297,147.4 r180 top
R5_3 "10K" 0603 233.1,147.6 r180 top
R5_4 "10K" 0603 199.5,147.7 r180 top
R5_5 "10K" 0603 300.7,147.5 r180 top
R5_6 "10K" 0603 267.097,147.6 r180 top
R6_1 "6K04" 0603 147.6,124.8 r180 bottom
R6_2 "6K04" 0603 113.5,124.55 r180 bottom
R6_3 "6K04" 0603 214.4,124.8 r180 bottom
R6_4 "6K04" 0603 181,124.8 r180 bottom
R6_5 "6K04" 0603 281.3,124.6 r180 bottom
R6_6 "6K04" 0603 247.8,124.7 r180 bottom
R7_1 "1000" 0603 151.5,124.8 r0 bottom
R7_2 "1000" 0603 117.4,124.55 r0 bottom
R7_3 "1000" 0603 218.3,124.8 r0 bottom
R7_4 "1000" 0603 184.9,124.8 r0 bottom
R7_5 "1000" 0603 285.2,124.6 r0 bottom
R7_6 "1000" 0603 251.7,124.7 r0 bottom
R40_1 "27R 1% 1206(3216)" RESC1206(3216)_L 154.5,107.4 r0 top value="27.00 Ohm"
R40_2 "27R 1% 1206(3216)" RESC1206(3216)_L 120.4,107.15 r0 top value="27.00 Ohm"
R40_3 "27R 1% 1206(3216)" RESC1206(3216)_L 221.3,107.4 r0 top value="27.00 Ohm"
R40_4 "27R 1% 1206(3216)" RESC1206(3216)_L 187.9,107.4 r0 top value="27.00 Ohm"
R40_5 "27R 1% 1206(3216)" RESC1206(3216)_L 288.2,107.2 r0 top value="27.00 Ohm"
R40_6 "27R 1% 1206(3216)" RESC1206(3216)_L 254.7,107.3 r0 top value="27.00 Ohm"
R41_1 "10R 1% 1206(3216)" RESC1206(3216)_L 157.1,90.4 r90 top value="10.00 Ohm"
R41_2 "10R 1% 1206(3216)" RESC1206(3216)_L 123,90.15 r90 top value="10.00 Ohm"
R41_3 "10R 1% 1206(3216)" RESC1206(3216)_L 223.9,90.4 r90 top value="10.00 Ohm"
R41_4 "10R 1% 1206(3216)" RESC1206(3216)_L 190.5,90.4 r90 top value="10.00 Ohm"
R41_5 "10R 1% 1206(3216)" RESC1206(3216)_L 290.8,90.2 r90 top value="10.00 Ohm"
R41_6 "10R 1% 1206(3216)" RESC1206(3216)_L 257.3,90.3 r90 top value="10.00 Ohm"
R42_1 "4R7 1% 1206(3216)" RESC1206(3216)_L 150.25,79.8 r0 top value="4.70 Ohm"
R42_2 "4R7 1% 1206(3216)" RESC1206(3216)_L 116.15,79.55 r0 top value="4.70 Ohm"
R42_3 "4R7 1% 1206(3216)" RESC1206(3216)_L 217.05,79.8 r0 top value="4.70 Ohm"
R42_4 "4R7 1% 1206(3216)" RESC1206(3216)_L 183.65,79.8 r0 top value="4.70 Ohm"
R42_5 "4R7 1% 1206(3216)" RESC1206(3216)_L 283.95,79.6 r0 top value="4.70 Ohm"
R42_6 "4R7 1% 1206(3216)" RESC1206(3216)_L 250.45,79.7 r0 top value="4.70 Ohm"
R43_1 "1K 1% 0603(1608)" RESC0603(1608)_M 138.3,125.9 r270 top value="1000.00 Ohm"
R43_2 "1K 1% 0603(1608)" RESC0603(1608)_M 104.2,125.65 r270 top value="1000.00 Ohm"
R43_3 "1K 1% 0603(1608)" RESC0603(1608)_M 205.1,125.9 r270 top value="1000.00 Ohm"
R43_4 "1K 1% 0603(1608)" RESC0603(1608)_M 171.7,125.9 r270 top value="1000.00 Ohm"
R43_5 "1K 1% 0603(1608)" RESC0603(1608)_M 272,125.7 r270 top value="1000.00 Ohm"
R43_6 "1K 1% 0603(1608)" RESC0603(1608)_M 238.5,125.8 r270 top value="1000.00 Ohm"
R44_1 "10R 5% 2512(6432)" RESC2512(6432)_M 138.4,173.3 r270 bottom value="2.20 Ohm"
R44_2 "10R 5% 2512(6432)" RESC2512(6432)_M 104.3,173.05 r270 bottom value="2.20 Ohm"
R44_3 "10R 5% 2512(6432)" RESC2512(6432)_M 205.2,173.3 r270 bottom value="2.20 Ohm"
R44_4 "10R 5% 2512(6432)" RESC2512(6432)_M 171.8,173.3 r270 bottom value="2.20 Ohm"
R44_5 "10R 5% 2512(6432)" RESC2512(6432)_M 272.1,173.1 r270 bottom value="2.20 Ohm"
R44_6 "10R 5% 2512(6432)" RESC2512(6432)_M 238.6,173.2 r270 bottom value="2.20 Ohm"
R45_1 "4k7" R0805 140.35,171.5 r180 top
R45_2 "4k7" R0805 106.25,171.25 r180 top
R45_3 "4k7" R0805 207.15,171.5 r180 top
R45_4 "4k7" R0805 173.75,171.5 r180 top
R45_5 "4k7" R0805 274.05,171.3 r180 top
R45_6 "4k7" R0805 240.55,171.4 r180 top
R46_1 "4k7" R0805 144.65,171.5 r0 top
R46_2 "4k7" R0805 110.55,171.25 r0 top
R46_3 "4k7" R0805 211.45,171.5 r0 top
R46_4 "4k7" R0805 178.05,171.5 r0 top
R46_5 "4k7" R0805 278.35,171.3 r0 top
R46_6 "4k7" R0805 244.85,171.4 r0 top
R47_1 "100R" R0805 140,183.1 r90 top
R47_2 "100R" R0805 105.9,182.85 r90 top
R47_3 "100R" R0805 206.8,183.1 r90 top
R47_4 "100R" R0805 173.4,183.1 r90 top
R47_5 "100R" R0805 273.7,182.9 r90 top
R47_6 "100R" R0805 240.2,183 r90 top
R93_1 "15k" R0805 143.7,175.1 r90 top
R93_2 "15k" R0805 109.6,174.85 r90 top
R93_3 "15k" R0805 210.6,175.1 r90 top
R93_4 "15k" R0805 177.1,175.1 r90 top
R93_5 "15k" R0805 277.4,174.9 r90 top
R93_6 "15k" R0805 243.9,175 r90 top
R94_1 "15k" R0805 141.3,175.1 r90 top
R94_2 "15k" R0805 107.2,174.85 r90 top
R94_3 "15k" R0805 208.1,175.1 r90 top
R94_4 "15k" R0805 174.7,175.1 r90 top
R94_5 "15k" R0805 275,174.9 r90 top
R94_6 "15k" R0805 241.5,175 r90 top
R95_1 "22k" R0805 144.5,178.7 r180 top
R95_2 "22k" R0805 110.4,178.45 r180 top
R95_3 "22k" R0805 211.3,178.7 r180 top
R95_4 "22k" R0805 177.9,178.7 r180 top
R95_5 "22k" R0805 278.2,178.5 r180 top
R95_6 "22k" R0805 244.7,178.6 r180 top
R96_1 "22k" R0805 140.7,178.7 r0 top
R96_2 "22k" R0805 106.6,178.45 r0 top
R96_3 "22k" R0805 207.5,178.7 r0 top
R96_4 "22k" R0805 174.1,178.7 r0 top
R96_5 "22k" R0805 274.4,178.5 r0 top
R96_6 "22k" R0805 240.9,178.6 r0 top
RB1_1 "47.00 Ohm" RESC1206(3216)_M 141.1,136.95 r270 top
RB1_2 "47.00 Ohm" RESC1206(3216)_M 107,136.7 r270 top
RB1_3 "47.00 Ohm" RESC1206(3216)_M 207.9,136.95 r270 top
RB1_4 "47.00 Ohm" RESC1206(3216)_M 174.5,136.95 r270 top
RB1_5 "47.00 Ohm" RESC1206(3216)_M 274.8,136.75 r270 top
RB1_6 "47.00 Ohm" RESC1206(3216)_M 241.3,136.85 r270 top
RG1_1 "10R 5% 2512(6432)" RESC2512(6432)_M 149,93.4 r270 top value="2.20 Ohm"
RG1_2 "10R 5% 2512(6432)" RESC2512(6432)_M 114.9,93.15 r270 top value="2.20 Ohm"
RG1_3 "10R 5% 2512(6432)" RESC2512(6432)_M 215.8,93.4 r270 top value="2.20 Ohm"
RG1_4 "10R 5% 2512(6432)" RESC2512(6432)_M 182.4,93.4 r270 top value="2.20 Ohm"
RG1_5 "10R 5% 2512(6432)" RESC2512(6432)_M 282.7,93.2 r270 top value="2.20 Ohm"
RG1_6 "10R 5% 2512(6432)" RESC2512(6432)_M 249.2,93.3 r270 top value="2.20 Ohm"
RG2_1 "2R2 5% 2512(6432)" RESC2512(6432)_M 143.6,93.4 r270 top value="2.20 Ohm"
RG2_2 "2R2 5% 2512(6432)" RESC2512(6432)_M 109.9,93 r270 top value="2.20 Ohm"
RG2_3 "2R2 5% 2512(6432)" RESC2512(6432)_M 210.6,93.4 r270 top value="2.20 Ohm"
RG2_4 "2R2 5% 2512(6432)" RESC2512(6432)_M 177.3,93.4 r270 top value="2.20 Ohm"
RG2_5 "2R2 5% 2512(6432)" RESC2512(6432)_M 277.6,93.2 r270 top value="2.20 Ohm"
RG2_6 "2R2 5% 2512(6432)" RESC2512(6432)_M 244,93.3 r270 top value="2.20 Ohm"
T1_1 "CTX02-13664 (MOUSER)" CTX02-16031 163.1,167.8 r270 top
T1_2 "CTX02-13664(MOUSER)" CTX02-16031 129,167.55 r270 top
T1_3 "CTX02-16664 (MOUSER)" CTX02-16031 229.9,167.8 r270 top
T1_4 "CTX02-13664 (MOUSER)" CTX02-16031 196.5,167.8 r270 top
T1_5 "CTX02-13664(MOUSER)" CTX02-16031 296.8,167.6 r270 top
T1_6 "CTX02-13664(MOUSER)" CTX02-16031 263.3,167.7 r270 top
T1B "CON1" TERMINAL 148.7,74.2 r0 top
T1C "CON1" TERMINAL_POST#1 161.06,74.4 r0 top
T1E_T2C "CON1" TERMINAL 142.7,74.2 r180 top
T2B "CON1" TERMINAL 121.7,74.2 r0 top
T2E "CON1" TERMINAL 127.7,74.2 r0 top
T3B "CON1" TERMINAL 215.5,74.2 r0 top
T3C "CON1" TERMINAL_POST#2 228.66,74.1 r0 top
T3E_T4C "CON1" TERMINAL 209.5,74.2 r180 top
T4B "CON1" TERMINAL 188.5,74.2 r0 top
T4E "CON1" TERMINAL 194.5,74.2 r0 top
T5B "CON1" TERMINAL 282.2,74.2 r0 top
T5C "CON1" TERMINAL_POST#3 287.36,74.2 r0 top
T5E_T6C "CON1" TERMINAL 276.2,74.2 r180 top
T6B "CON1" TERMINAL 255.2,74.2 r0 top
T6E "CON1" TERMINAL 261.2,74.2 r0 top
TP1 "PTR1PAD1-13" P1-13 116.7,184 r0 top
TP2 "PTR1PAD1-13" P1-13 151.1,182.5 r0 top
TP3 "PTR1PAD1-13" P1-13 184.5,180.9 r0 top
TP4 "PTR1PAD1-13" P1-13 199.8,181.9 r0 top
TP5 "PTR1PAD1-13" P1-13 249.1,182.8 r0 top
TP6 "PTR1PAD1-13" P1-13 282.7,182.1 r0 top
U1_1 "LM2941CS" KTT0005B_N 161.7,118.6 r270 top
U1_2 "LM2941CS" KTT0005B_N 127.6,118.35 r270 top
U1_3 "LM2941CS" KTT0005B_N 228.5,118.6 r270 top
U1_4 "LM2941CS" KTT0005B_N 195.1,118.6 r270 top
U1_5 "LM2941CS" KTT0005B_N 295.4,118.4 r270 top
U1_6 "LM2941CS" KTT0005B_N 261.9,118.5 r270 top
U2_1 "LT3439" TSSOP16 154.914,175.044 r90 top
U2_2 "LT3439" TSSOP16 120.814,174.794 r90 top
U2_3 "LT3439" TSSOP16 221.714,175.044 r90 top
U2_4 "LT3439" TSSOP16 188.314,175.044 r90 top
U2_5 "LT3439" TSSOP16 288.614,174.844 r90 top
U2_6 "LT3439" TSSOP16 255.114,174.944 r90 top
U3_1 "LM2991SX" KTT0005B_M 149.6,118.6 r270 top
U3_2 "LM2991SX" KTT0005B_M 115.5,118.35 r270 top
U3_3 "LM2991SX" KTT0005B_M 216.4,118.6 r270 top
U3_4 "LM2991SX" KTT0005B_M 183,118.6 r270 top
U3_5 "LM2991SX" KTT0005B_M 283.3,118.4 r270 top
U3_6 "LM2991SX" KTT0005B_M 249.8,118.5 r270 top
U20_1 "Part Number: 1ED020I12B2XUMA1" PG-DSO-16-15 141.905,159.801 r90 top value=Value
U20_2 "Part Number: 1ED020I12B2XUMA1" PG-DSO-16-15 107.805,159.551 r90 top value=Value
U20_3 "Part Number: 1ED020I12B2XUMA1" PG-DSO-16-15 208.705,159.801 r90 top value=Value
U20_4 "Part Number: 1ED020I12B2XUMA1" PG-DSO-16-15 175.305,159.801 r90 top value=Value
U20_5 "Part Number: 1ED020I12B2XUMA1" PG-DSO-16-15 275.605,159.601 r90 top value=Value
U20_6 "Part Number: 1ED020I12B2XUMA1" PG-DSO-16-15 242.105,159.701 r90 top value=Value
U25_1 "SN74LV1T34DCKR" DCK0005A_L 148.1,174.3 r270 top
U25_2 "SN74LV1T34DCKR" DCK0005A_L 114,174.05 r270 top
U25_3 "SN74LV1T34DCKR" DCK0005A_L 214.9,174.3 r270 top
U25_4 "SN74LV1T34DCKR" DCK0005A_L 181.5,174.3 r270 top
U25_5 "SN74LV1T34DCKR" DCK0005A_L 281.8,174.1 r270 top
U25_6 "SN74LV1T34DCKR" DCK0005A_L 248.3,174.2 r270 top
X1 "MX34032UF1" CONN_MX34032UF1 184,195.1 r0 top

## Footprints (in the part's own frame and the unit in brackets; to place one, negate y for a bottom-side part, rotate by r counter-clockwise, add the part's x,y. Pads: shape width x height; smd on the part's side, far side on the other; paste and mask are expansions set on the pad)
0603 [mil]
  rect 30x30 smd: 1(0,0) 2(55,0)
  silkscreen extent -35,-35 90,35
1206 [mil]
  rect 60x60 smd: 1(0,0) 2(135,0)
  silkscreen extent -50,-50 185,50
AVX-7343-31_L [mm] "Molded Capacitor, 2-Leads, Body 7.5x4.5mm, IPC High Density"
  rect 2.1x2.4 smd: 1(-2.925,0) 2(2.925,0)
  silkscreen extent -4.47,-2.25 3.75,2.25, body extent -3.97,-2.25 3.97,2.25, height 3.1
CAPC1206(3216)75_L [mm] "Chip Capacitor, Body 3.2x1.6mm, Height 0.75mm, IPC High Density"
  rect 0.95x1.7 smd: 1(-1.4,0) 2(1.4,0)
  silkscreen extent -0.55,-0.75 0.55,0.75, body extent -1.7,-0.9 1.7,0.9, height 0.75
CAPC1206(3216)100_L [mm] "Chip Capacitor, Body 3.2x1.6mm, Height 1mm, IPC High Density"
  rect 0.95x1.7 smd: 1(-1.4,0) 2(1.4,0)
  silkscreen extent -0.55,-0.75 0.55,0.75, body extent -1.7,-0.9 1.7,0.9, height 1
CAPC1210(3225)170_N [mm] "Chip Capacitor, Body 3.2x2.5mm, Height 1.7mm, IPC Medium Density"
  rect 1.15x2.7 smd: 1(-1.5,0) 2(1.5,0)
  silkscreen extent -0.55,-1.25 0.55,1.25, body extent -1.7,-1.35 1.7,1.35, height 1.7
CAPC3225X279X50LL20T25 [mm] "Chip Capacitor, 2-Leads, Body 3.40x2.70mm, IPC High Density"
  rect 1.1x2.6 smd: 1(-1.3,0) 2(1.3,0)
  silkscreen extent -0.35,-1.2 0.35,1.2, body extent -1.7,-1.35 1.7,1.35, height 2.79
CONN_MX34032UF1 [mil]
  round 63 hole 43 mask+0: 1(0,0) 2(43.31,-118.11) 3(86.61,0) 4(129.92,-118.11) 5(173.23,0) 6(216.54,-118.11) 7(259.84,0) 8(303.15,-118.11) 9(346.46,0) 10(389.76,-118.11) 11(433.07,0) 12(476.38,-118.11) 13(519.68,0) 14(562.99,-118.11) 15(606.3,-0.16) 16(649.61,-118.11) 17(692.91,0) 18(736.22,-118.11) 19(779.53,0) 20(822.83,-118.11) 21(866.14,0) 22(909.45,-118.11) 23(952.76,0) 24(996.06,-118.11) 25(1039.37,0) 26(1082.68,-118.11) 27(1125.98,0) 28(1169.29,-118.11) 29(1212.6,0) 30(1255.91,-118.11) 31(1299.21,0) 32(1342.52,-118.11)
  round 130 hole 130: 33(-137.72,-200.94) 34(1480.31,45.28)
  silkscreen extent -261,-383 1594,174
CTX02-16031 [mm]
  rect 2.5x1.75 smd: 1(0,0)
  oval 2.5x1.75 smd: 2(0,-2.5) 3(0,-5) 4(0,-7.5) 5(0,-10) 6(0,-12.5) 7(15,-12.5) 8(15,-10) 9(15,-7.5) 10(15,-5) 11(15,-2.5) 12(15,0)
  silkscreen extent 2.09,-14.22 13.11,1.52
DCK0005A_L [mm] "SOT23, 5-Leads, Body 2.15x1.4mm, Pitch 0.65mm, IPC High Density"
  rrect25% 0.65x0.4 smd: 1(-1.025,0.65) 2(-1.025,0) 3(-1.025,-0.65) 4(1.025,-0.65) 5(1.025,0.65)
  silkscreen extent -1.15,-1.1 0.3,1.53, body extent -1.14,-1 1.14,1, height 0.94
DIOD-SMB-2_V [mm] "Molded Diode, 2-Leads, Body 4.57x3.94mm"
  rect 2.5x2.3 smd: 1(-2.15,0) 2(2.15,0)
  silkscreen extent -2.3,-2 3.9,2, body extent -2.5,-1.97 2.5,1.97, height 2.5
DIOD-SOD-123-2-A_V [mm] "SOD-123, 2-Leads, Body 2.7x1.55mm"
  rect 1.2x0.7 smd paste+0: 1(-1.85,0) 2(1.85,0)
  silkscreen extent -1.35,-0.77 2.95,0.77, body extent -1.35,-0.77 1.35,0.77, height 1.45
FAIR-SMA-2_V [mm] "Molded Diode, 2-Leads, Body 4.292x2.693mm"
  rect 1.555x1.57 smd: 1(-1.915,0) 2(1.915,0)
  silkscreen extent -2.3,-1.45 3.19,1.45, body extent -2.15,-1.35 2.15,1.35, height 2.44
INF-SOD323_V [mm] "SOD, 2-Leads, Body 1.7x1.25 mm"
  rect 0.6x0.8 smd: 1(0,1.25) 2(0,-1.25)
  silkscreen extent -0.76,-0.85 0.6,1.83, body extent -0.63,-0.85 0.63,0.85, height 1.1
KTT0005B_M [mm] "DPAK, 5-Leads, Body 10.65x9.65mm, Pitch 1.7mm, IPC Low Density"
  rrect10% 4.45x1.05 smd: 1(-6.3,3.4) 2(-6.3,1.7) 3(-6.3,0) 4(-6.3,-1.7) 5(-6.3,-3.4)
  rrect2% 8.5x6.45 smd: 6(4.25,0)
  silkscreen extent -6.42,-5.35 -0.4,5.35, body extent -3.1,-5.32 6.55,5.33, height 4.83
KTT0005B_N [mm] "DPAK, 5-Leads, Body 10.65x9.65mm, Pitch 1.7mm, IPC Medium Density"
  rrect10% 4.15x1 smd: 1(-6.25,3.4) 2(-6.25,1.7) 3(-6.25,0) 4(-6.25,-1.7) 5(-6.25,-3.4)
  rrect2% 8.2x6.4 smd: 6(4.2,0)
  silkscreen extent -6.37,-5.35 -0.3,5.35, body extent -3.15,-5.32 6.5,5.33, height 4.83
ONSC-DPAK-3-369C-01_V [mm] "DPAK, 3-Leads, Body 6.54x6.095mm, Pitch 2.29mm"
  rect 3x1.6 smd: 1(-4.4,2.29) 3(-4.4,-2.29)
  rect 6.2x5.8 smd: 4(2.8,0)
  silkscreen extent -4.52,-3.27 -0.45,3.76, body extent -1.6,-3.27 4.49,3.27, height 2.38
ONSC-SMB-2-403A-03_J_V [mm] "Molded, 2-Leads, Body 4.6x3.95mm"
  rect 2.159x2.743 smd: 1(-2.21,0) 2(2.21,0)
  silkscreen extent -3.16,-2 2.3,2.05, body extent -2.3,-1.97 2.3,1.97, height 2.47
P1-13 [mil] "P1-13"
  oct 82.3x82.3 hole 52: TP(0,0)
PG-DSO-16-15 [mil]
  rect 68x21 smd paste+0 mask+0: 1(-185,175) 2(-185,125) 3(-185,75) 4(-185,25) 5(-185,-25) 6(-185,-75) 7(-185,-125) 8(-185,-175) 9(185,-175) 10(185,-125) 11(185,-75) 12(185,-25) 13(185,25) 14(185,75) 15(185,125) 16(185,175)
  silkscreen extent -154,-211 239,211, body extent 0,0 10,10, height 10
R0805 [mm] "R0805"
  rect 1.3x1.5 smd: 1(-0.95,0) 2(0.95,0)
  silkscreen extent -1.4,-1.02 1.4,1.02
RESC0603(1608)_M [mm] "Chip Resistor, Body 1.6x0.8mm, IPC Low Density"
  rect 1.1x1.1 smd: 1(-0.9,0) 2(0.9,0)
  silkscreen extent -0.05,-0.45 0.05,0.45, body extent -0.85,-0.47 0.85,0.47, height 0.6
RESC1206(3216)_L [mm] "Chip Resistor, Body 3.2x1.6mm, IPC High Density"
  rect 0.95x1.7 smd: 1(-1.35,0) 2(1.35,0)
  silkscreen extent -0.5,-0.75 0.5,0.75, body extent -1.67,-0.87 1.67,0.87, height 0.75
RESC1206(3216)_M [mm] "Chip Resistor, Body 3.2x1.6mm, IPC Low Density"
  rect 1.35x1.9 smd: 1(-1.55,0) 2(1.55,0)
  silkscreen extent -0.5,-0.85 0.5,0.85, body extent -1.67,-0.87 1.67,0.87, height 0.75
RESC2512(6432)_M [mm] "Chip Resistor, Body 6.4x3.2mm, IPC Low Density"
  rect 1.45x3.45 smd: 1(-3.1,0) 2(3.1,0)
  silkscreen extent -2,-1.63 2,1.63, body extent -3.25,-1.7 3.25,1.7, height 0.75
SMB [mil]
  rect 91x89 smd: 1(-78.5,0) 2(78.5,0)
  silkscreen extent -199,-83 96,83, body extent 0,0 10,10, height 10
STM-SMB_P_V [mm] "SMB, 2-Leads, Body 4.325x3.625mm"
  rect 1.62x2.18 smd: 1(-2.11,0) 2(2.11,0)
  silkscreen extent -2.3,-1.97 3.42,1.97, body extent -2.16,-1.81 2.16,1.81, height 2.59
TERMINAL [mm]
  rrect50% 3x6 hole 1 slot 4 at 90 deg: 1(0,0)
TERMINAL_POST#1 [mm]
  round 6 hole 3: 1(2.54,0.8)
TERMINAL_POST#2 [mm]
  round 6 hole 3: 1(2.54,1.1)
TERMINAL_POST#3 [mm]
  round 6 hole 3: 1(2.54,1)
TSSOP16 [mm]
  rect 2.4x4 hole 2: 0(2.756,-2.286)
  rect 1.05x0.45 smd: 1(0,0)
  oval 1.05x0.45 smd: 2(0,-0.65) 3(0,-1.3) 4(0,-1.95) 5(0,-2.6) 6(0,-3.25) 7(0,-3.9) 8(0,-4.55) 9(5.5,-4.55) 10(5.5,-3.9) 11(5.5,-3.25) 12(5.5,-2.6) 13(5.5,-1.95) 14(5.5,-1.3) 15(5.5,-0.65) 16(5.5,0)
  silkscreen extent 1.36,-4.87 4.14,0.32
WE-TPC-5828-LH [mm] "SMD Inductor, 2-Leads, Body 5.8 x 5.8 mm"
  rect 2.2x6.3 smd: 1(-2.05,0) 2(2.05,0)
  silkscreen extent -0.3,-3.05 0.3,3.05, body extent -2.9,-2.9 2.9,2.9, height 2.79

## Part data
C1_1 C1_2 C1_3 C1_4 C1_5 C1_6 C8_1 C8_2 C8_3 C8_4 C8_5 C8_6: library part CMP-1037-04557-1, "CAP 470nF 25V ±10% 1206 (3216 Metric) Thickness 1mm SMD", Case-EIA=1206, Case-Metric=3216, Rated Voltage="25 V", Tolerance=±10%, Max Thickness="1 mm", Technology=SMT
C2_1 C2_2 C2_3 C2_4 C2_5 C2_6 C4_ C4_1 C4_2 C4_3 C4_5 C4_6 C9_1 C9_2 C9_3 C9_4 C9_5 C9_6 C10_1 C10_2 C10_3 C10_4 C10_5 C10_6: library part CMP-2000-07307-1, "Tantalum Capacitor, 47 uF, +/- 10%, 25 V, -55 to 125 degC, 2-Pin SMD, Tape and Reel", Capacitance=47uF, Case Code - in=2917, Case Code - mm=7343, Leakage Current=11.8uA, Manufacturer=AVX, Maximum Operating Temperature=+125C, Mfr Case Code=DCase, Minimum Operating Temperature=-55C, Operating Temperature Range=-55Cto+125C, Package / Case=2917(7343metric), Package Description="2-Pin Surface Mount Device, Body 7.3 x 4.35 mm", Package Reference=7343-31, Ripple Current=0.4mA, Tolerance=10%, Voltage Rating=25V, Brand=AVX, Datasheet URL=https://datasheet.ciiva.com/11793/0900766b80066cb4-11793194.pdf, Datasheet Version=02/2004, Dissipation Factor DF=6, ESR=150mOhms, Height=3.1mm, Length=7.3mm, Manufacturer URL=http://www.avx.com/, Mounting Technology=SurfaceMount, Packaging=Reel, Product=TantalumSolidLowESRStandardGrade, Product Category=TantalumCapacitors-SolidSMD, Qualification=Commercial, RoHS=True, Series=TPS, Termination Style=SMD/SMT, Unit Weight=0.023634oz, Width=4.3mm
C3a_1 C3a_2 C3a_3 C3a_4 C3a_5 C3a_6 C3b_1 C3b_2 C3b_3 C3b_4 C3b_5 C3b_6 C11a_1 C11a_2 C11a_3 C11a_4 C11a_5 C11a_6 C11b_1 C11b_2 C11b_3 C11b_4 C11b_5 C11b_6: library part CMP-2000-05478-1, "Ceramic Capacitor, 25 V, 22 uF, +/-10%, -55 to 85 degC, 2-Pin SMD (1210), RoHS, Tape and Reel", Capacitance=22uF, Case Code - in=1210, Case Code - mm=3225, Case Height=2.79mm, Case Length=3.2mm, Case Width=2.5mm, Dielectric=X5R, Manufacturer=AVX, Maximum Operating Temperature=+85C, Minimum Operating Temperature=-55C, Operating Temperature Range=-55Cto+85C, Package / Case=1210(3225metric), Package Description="2-Pin Surface Mount Device, Body 3.2 x 2.5 mm", Temperature Coefficient / Code=+/-15%, Tolerance=10%, Voltage Rating=25V, Brand=AVX, Datasheet URL=http://datasheets.avx.com/cx5r.pdf, Datasheet Version=05/2016, Dimensions=2.5mmWx3.2mmLx2.79mmH, Factory Pack Quantity=1000, Manufacturer URL=http://www.avx.com/, Mounting Technology=SurfaceMount, Package Reference=1210, Packaging=Reel, Product=GeneralTypeMLCCs, Product Category=MultilayerCeramicCapacitorsMLCC-SMD/SMT, RoHS=Details, Termination Style=SMD/SMT, Type=StandardX5RMLCCs, Voltage Rating DC=25V
C5_1 C5_2 C5_3 C5_4 C5_5 C5_6 C6_1 C6_2 C6_3 C6_4 C6_5 C6_6 C7_1 C7_2 C7_3 C7_4 C7_5 C7_6: library part CAP
C67_1 C67_2 C67_3 C67_4 C67_5 C67_6 C72_1 C72_2 C72_3 C72_4 C72_5 C72_6 C73_1 C73_2 C73_3 C73_4 C73_5 C73_6 C(Desat)1_1 C(Desat)1_2 C(Desat)1_3 C(Desat)1_4 C(Desat)1_5 C(Desat)1_6: library part CMP-1037-01572-1, "CAP 100pF 50V ±5% 1206 (3216 Metric) Thickness 0.75mm SMD", Case-EIA=1206, Case-Metric=3216, Rated Voltage="50 V", Tolerance=±5%, Max Thickness="0.75 mm", Technology=SMT
C68_1 C68_2 C68_3 C68_4 C68_5 C68_6 C69_1 C69_2 C69_3 C69_4 C69_5 C69_6 C70_1 C70_2 C70_3 C70_4 C70_5 C70_6 C71_1 C71_2 C71_3 C71_4 C71_5 C71_6: library part CMP-1038-02022-1, "CAP 1uF 25V -20% to +80% 1210 (3225 Metric) Thickness 1.7mm SMD", Case-EIA=1210, Case-Metric=3225, Rated Voltage="25 V", Tolerance="-20% to +80%", Max Thickness="1.7 mm", Technology=SMT
D1_1 D1_2 D1_3 D1_4 D1_5 D1_6 D2_1 D2_2 D2_3 D2_4 D2_5 D2_6 D3_1 D3_2 D3_3 D3_4 D3_5 D3_6 D4_1 D4_2 D4_3 D4_4 D4_5 D4_6: library part CMP-2000-05880-1, "Surface Mount Schottky Barrier Rectifier, 0.5 A, -65 to 150 degC, 2-Pin SOD-123, RoHS, Tape and Reel", If - Forward Current=0.5A, Ifsm - Forward Surge Current=5.5A, Ir - Reverse Current=20uA, Manufacturer=DiodesIncorporated, Maximum Operating Temperature=+150C, Minimum Operating Temperature=-65C, Operating Temperature Range=-65Cto+150C, Package / Case=SOD-123, Package Description="2-Pin Small Outline Diode, Body 2.7 x 1.55 mm", Package Reference=SOD-123-2, Pd - Power Dissipation=410mW, Vf - Forward Voltage=0.62Vat1A, Vrrm - Repetitive Reverse Voltage=40V, Brand=DiodesIncorporated, Configuration=Single, Datasheet URL=http://www.diodes.com/_files/datasheets/ds30138.pdf, Datasheet Version="Rev. 10-2, 03/2009", Factory Pack Quantity=3000, Height=1.25mm, Length=2.85mm, Manufacturer URL=http://www.diodes.com/, Mounting Style=SMD/SMT, Mounting Technology=SurfaceMount, Packaging=Reel, Product=SchottkyDiodes, Product Category=SchottkyDiodes&Rectifiers, RoHS=True, Series=B0540, Technology=Si, Termination Style=SMD/SMT, Type=SurfaceMountSchottkyBarrierDiode, Unit Weight=0.000353oz, Width=1.7mm
D25_1 D25_2 D25_3 D25_4 D25_5 D25_6: library part CMP-1183-00004-1, "Medium Power AF Schottky Diode, SOD323, Reel, Green", Manufacturer=Infineon, ComponentLink1Description="Manufacturer URL", ComponentLink1URL=http://www.infineon.com/, ComponentLink2Description=Datasheet, ComponentLink2URL=http://www.infineon.com/dgdl/bat165series.pdf?folderId=db3a304313d846880113def5812204a1&fileId=db3a304313d846880113df01f69804d6, ComponentLink3Description="Package Specification", ComponentLink3URL=http://www.infineon.com/dgdl/SOD323-Package_Overview.pdf?folderId=db3a30431936bc4b011952aab84f3bbe&fileId=db3a30431936bc4b011952beed653be3, Configuration=Single, CT (max)="12 pF", Green=TRUE, IF (max)="750 mA", Mounting Technology="Surface Mount", PackageDescription="2-Pin Small Outline Diode Package, 1.25 x 1.7 mm Body", PackageReference=SOD323, Packing=Reel, PartNumber=BAT165, VF (max)="700 mV", VR (max)="40 V"
D26_1 D26_2 D26_3 D26_4 D26_5 D26_6: library part CMP-2000-07172-1, "Power Schottky Rectifier, 1 A, 60 V, 2-Pin SMD (SMB), RoHS, Tape and Reel", Capacitance @ Vr, F=-, Current - Average Rectified (Io)=1A, Current - Reverse Leakage @ Vr=4µA@60V, Manufacturer=STMicroelectronics, Operating Temperature - Junction=150°C(Max), Package / Case=DO-214AA,SMB, Package Description="2-Pin Surface Mount Device, Body 4.325 x 3.625 mm", Package Reference=SMB_P, Standard Package=1, Supplier Device Package=SMB, Voltage - DC Reverse (Vr) (Max)=60V, Voltage - Forward (Vf) (Max) @ If=670mV@1A, Category=DiscreteSemiconductorProducts, Datasheet URL=http://www.st.com/content/ccc/resource/technical/document/datasheet/93/c1/06/0c/63/7c/41/d5/CD00001023.pdf/files/CD00001023.pdf/jcr:content/translations/en.CD00001023.pdf, Datasheet Version=03/2010, Diode Type=Schottky, Family=Diodes,Rectifiers-Single, Manufacturer URL=http://www.st.com/, Mounting Technology=SurfaceMount, Mounting Type=SurfaceMount, Online Catalog=SchottkyDiode, Other Names=497-7547-6, Other Related Documents=STPS160ViewAllSpecifications, Package URL=http://www.st.com/st-web-ui/static/active/en/resource/technical/document/datasheet/CD00279657.pdf, Packaging=Digi-Reel®, Reverse Recovery Time (trr)=-, Series=-, Speed=FastRecovery=200mA(Io)
D27_1 D27_2 D27_3 D27_4 D27_5 D27_6: library part CMP-2000-06998-1, "Fast Recovery Rectifier, 1 A, 1.3 V, -65 to 150 degC, 2-Pin SMD, RoHS, Tape and Reel", Average Rectified Current-Max=1A, Forward Voltage=1.3V, Manufacturer="Diodes Inc", Package Description="2-Pin Surface Mount Device, Body 4.315 x 3.62 mm", Package Reference=SMB-2, Reverse Current-Max=5µA, Reverse Voltage-Max [Vrrm]=1000V, Datasheet URL=http://www.diodes.com/_files/datasheets/ds15002.pdf, Datasheet Version="Rev. 14-2, 01/2015", Manufacturer URL=http://www.diodes.com/, Mounting Technology=SurfaceMount, Reverse Recovery Time-Max=500ns
D30_1 D30_2 D30_3 D30_4 D30_5 D30_6 D33_1 D33_2 D33_3 D33_4 D33_5 D33_6: library part CMP-2000-06230-1, "Fairchild ES1D Diode, 200 V, 1 A, -50 to 150 degC, 2-Pin SMA, RoHS, Cut Tape", Average Rectified Current-Max=1A, Forward Voltage=0.92V, Manufacturer="Fairchild Semiconductor", Package Description="2-Pin SMA, Body 4.292 x 2.693 mm", Package Reference=SMA-2, Power Dissipation=1470mW, Reverse Current-Max=5µA, Reverse Voltage-Max [Vrrm]=200V, Datasheet URL=https://datasheet.ciiva.com/5739/575529-5739201.pdf, Datasheet Version="Rev. C1", IF=1A, Manufacturer URL=https://www.fairchildsemi.com/, Mounting Technology=SurfaceMount, PartNumber=ES1D, Reverse Recovery Time-Max=15ns, VRRM=200V
D31_1 D31_2 D31_3 D31_4 D31_5 D31_6 D32_1 D32_2 D32_3 D32_4 D32_5 D32_6: library part CMP-1061-00425-1, "600 W Peak Power Zener Transient Voltage Suppressor, Unidirectional, 2-Pin SMB, Pb-Free, Tape and Reel", Manufacturer="On Semiconductor", ComponentLink1Description="Manufacturer URL", ComponentLink1URL=http://www.onsemi.com/, ComponentLink2Description=Datasheet, ComponentLink2URL=http://www.onsemi.com/pub_link/Collateral/P6SMB6.8AT3-D.PDF, ComponentLink3Description="Package Specification", ComponentLink3URL=http://www.onsemi.com/pub_link/Collateral/P6SMB6.8AT3-D.PDF, DatasheetVersion="Rev. J", Direction=Unidirectional, IR Max (uA)=5, Mounting Technology="Surface Mount", PackageDescription="2-Pin Small Molded Package, J-Bend Lead, Body 4.33 x 3.625 mm", PackageReference=SMB-2-403A-03_J, PackageVersion="Rev. J, 07/2012", Packing="Tape and Reel", PartNumber=P6SMB36AT3G, PPK Max (W)=600, RoHS=Pb-Free, V(BR) Typ (V)=36
D125 D126 D127 D128 D129 D130: library part STTH112U, "No Description Available", Built_By=EMA_UL_Team, Copyright="Copyright (C) 2018 Accelerated Designs. All rights reserved", Manufacturer_Part_Number=STTH112U, RefDes=RefDes, Type=DEV, Vendor=STMicroelectronics
L1_1 L1_2 L1_3 L1_4 L1_5 L1_6 L2_1 L2_2 L2_3 L2_4 L2_5 L2_6: library part CMP-0227-00372-1, "SMD Shielded Tiny Power Inductor WE-TPC, L = 10.0 µH", Inductance="10.0 µH", ComponentLink1Description="Manufacturer Link", ComponentLink1URL=http://www.we-online.com, ComponentLink2Description=Datasheet, ComponentLink2URL=http://www.we-online.de/katalog/media/pdf/744053100.pdf, DatasheetVersion="ver 6, Aug-2010", PackageDescription="SMD Inductor, 2-Leads, Body 5.8 x 5.8 mm", PackageReference=WE-TPC-5828-LH, PackageVersion=2010
Q1_1 Q1_2 Q1_3 Q1_4 Q1_5 Q1_6: library part CMP-1030-00006-1, "Complementary Power Transistor, 3-Pin DPAK, Tape and Reel", Manufacturer="On Semiconductor", ComponentLink1Description="Manufacturer URL", ComponentLink1URL=http://www.onsemi.com/, ComponentLink2Description=Datasheet, ComponentLink2URL=http://www.onsemi.cn/pub_link/Collateral/MJD44H11-D.PDF, ComponentLink3Description="Package Specification", ComponentLink3URL=http://www.onsemi.cn/pub_link/Collateral/369C.PDF, DatasheetVersion="Rev. 16", IC Continuous (A)=8, Mounting Technology="Surface Mount", PackageDescription="3-Pin Flange Mount, Body 6.54 x 6.095 mm, Pitch 2.29 mm", PackageReference=DPAK-3-369C-01, PackageVersion="Rev. E, 02/2014", Packing="Tape and Reel", PartNumber=MJD44H11T4, Polarity=NPN, RoHS=FALSE
Q2_1 Q2_2 Q2_3 Q2_4 Q2_5 Q2_6: library part CMP-1046-00017-1, "Complementary Power Transistor, 3-Pin DPAK, Tape and Reel", Manufacturer="On Semiconductor", ComponentLink1Description="Manufacturer URL", ComponentLink1URL=http://www.onsemi.com/, ComponentLink2Description=Datasheet, ComponentLink2URL=http://www.onsemi.cn/pub_link/Collateral/MJD44H11-D.PDF, ComponentLink3Description="Package Specification", ComponentLink3URL=http://www.onsemi.cn/pub_link/Collateral/369C.PDF, DatasheetVersion="Rev. 16", IC Continuous (A)=8, Mounting Technology="Surface Mount", PackageDescription="3-Pin Flange Mount, Body 6.54 x 6.095 mm, Pitch 2.29 mm", PackageReference=DPAK-3-369C-01, PackageVersion="Rev. E, 02/2014", Packing="Tape and Reel", PartNumber=MJD45H11T4, Polarity=PNP, RoHS=FALSE
R1_1 R1_2 R1_3 R1_4 R1_5 R1_6 R2_1 R2_2 R2_3 R2_4 R2_5 R2_6 R3_1 R3_2 R3_3 R3_4 R3_5 R3_6 R4_1 R4_2 R4_3 R4_4 R4_5 R4_6 R5_1 R5_2 R5_3 R5_4 R5_5 R5_6 R6_1 R6_2 R6_3 R6_4 R6_5 R6_6 R7_1 R7_2 R7_3 R7_4 R7_5 R7_6: library part RES2
R40_1 R40_2 R40_3 R40_4 R40_5 R40_6: library part CMP-1014-00331-1, "27R 0.25W 1% 1206 (3216 Metric)  SMD", Case-EIA=1206, Case-Metric=3216, Power="0.25 W", Tolerance="1 %", Technology=SMT
R41_1 R41_2 R41_3 R41_4 R41_5 R41_6: library part CMP-1014-00284-1, "10R 0.25W 1% 1206 (3216 Metric)  SMD", Case-EIA=1206, Case-Metric=3216, Power="0.25 W", Tolerance="1 %", Technology=SMT
R42_1 R42_2 R42_3 R42_4 R42_5 R42_6: library part CMP-1014-00247-1, "4R7 0.25W 1% 1206 (3216 Metric)  SMD", Case-EIA=1206, Case-Metric=3216, Power="0.25 W", Tolerance="1 %", Technology=SMT
R43_1 R43_2 R43_3 R43_4 R43_5 R43_6: library part CMP-1012-00510-1, "1K 0.1W 1% 0603 (1608 Metric)  SMD", Case-EIA=0603, Case-Metric=1608, Power="0.1 W", Tolerance="1 %", Technology=SMT
R44_1 R44_2 R44_3 R44_4 R44_5 R44_6 RG1_1 RG1_2 RG1_3 RG1_4 RG1_5 RG1_6 RG2_1 RG2_2 RG2_3 RG2_4 RG2_5 RG2_6: library part CMP-1018-00010-1, "2R2 1W 5% 2512 (6432 Metric)  SMD", Case-EIA=2512, Case-Metric=6432, Power="1 W", Tolerance="5 %", Technology=SMT
R45_1 R45_2 R45_3 R45_4 R45_5 R45_6 R46_1 R46_2 R46_3 R46_4 R46_5 R46_6 R47_1 R47_2 R47_3 R47_4 R47_5 R47_6 R93_1 R93_2 R93_3 R93_4 R93_5 R93_6 R94_1 R94_2 R94_3 R94_4 R94_5 R94_6 R95_1 R95_2 R95_3 R95_4 R95_5 R95_6 R96_1 R96_2 R96_3 R96_4 R96_5 R96_6: library part R-US_R0805, "RESISTOR, American symbol"
RB1_1 RB1_2 RB1_3 RB1_4 RB1_5 RB1_6: library part CMP-1014-00360-1, "47R 0.25W 1% 1206 (3216 Metric)  SMD", Case-EIA=1206, Case-Metric=3216, Power="0.25 W", Tolerance="1 %", Technology=SMT
T1_1 T1_2 T1_3 T1_4 T1_5 T1_6: library part "CTX02-16031 (MOUSER)"
T1B T1C T1E_T2C T2B T2E T3B T3C T3E_T4C T4B T4E T5B T5C T5E_T6C T6B T6E: "Connector"
TP1 TP2 TP3 TP4 TP5 TP6: "TEST PIN"
U1_1 U1_2 U1_3 U1_4 U1_5 U1_6: library part CMP-0062-00618-3, "1A Low Dropout Adjustable Regulator, 5-pin TO-263", Manufacturer="Texas Instruments", PackageTopMarking=NSUZXYTTE#*LM2941CS*P+, PowerWise=N, Code_JEDEC=MO-169-AB, ComponentLink1Description="Datasheet URL", ComponentLink1URL=http://www.ti.com/general/docs/lit/getliterature.tsp?genericPartNumber=LM2941C&fileType=pdf, CompType="LDO IC", PackageDescription="TO-263, Molded, .400 x .390 x .180in, 5 Lead, .067in Pitch, Surface Mount", PackageReference=KTT0005B, PinCount=5, RoHS=N
U3_1 U3_2 U3_3 U3_4 U3_5 U3_6: library part CMP-0062-00569-3, "Negative Low Dropout Adjustable Regulator, 5-pin TO-263", Manufacturer="Texas Instruments", PackageTopMarking=NSUZXYTTE#*LM2991S*P+, PowerWise=N, Code_JEDEC=MO-169-AB, ComponentLink1Description="Datasheet URL", ComponentLink1URL=http://www.ti.com/general/docs/lit/getliterature.tsp?genericPartNumber=LM2991&fileType=pdf, CompType="LDO IC", PackageDescription="TO-263, Molded, .400 x .390 x .180in, 5 Lead, .067in Pitch, Surface Mount", PackageReference=KTT0005B, PinCount=5, RoHS=N
U20_1 U20_2 U20_3 U20_4 U20_5 U20_6: library part 1ED020I12B2XUMA1, "No Description Available", Built_By=EMA_UL_Team, Copyright="Copyright (C) 2018 Accelerated Designs. All rights reserved", Manufacturer_Part_Number=1ED020I12B2XUMA1, RefDes=RefDes, Type=DEV, Vendor=Infineon